# Altium PCB uADC_PCBPcbDoc.PcbDoc (part 1 of 2)
Units mm, origin at the board's own origin, x right, y up, seen from the top; angles counter-clockwise.
Board outline 125 x 63 mm, 4 copper layers (Top Layer, Layer 1, Layer 2, Bottom Layer), stack 2.084 mm thick; 242 components, 92 nets, 541 pads, 139 vias.
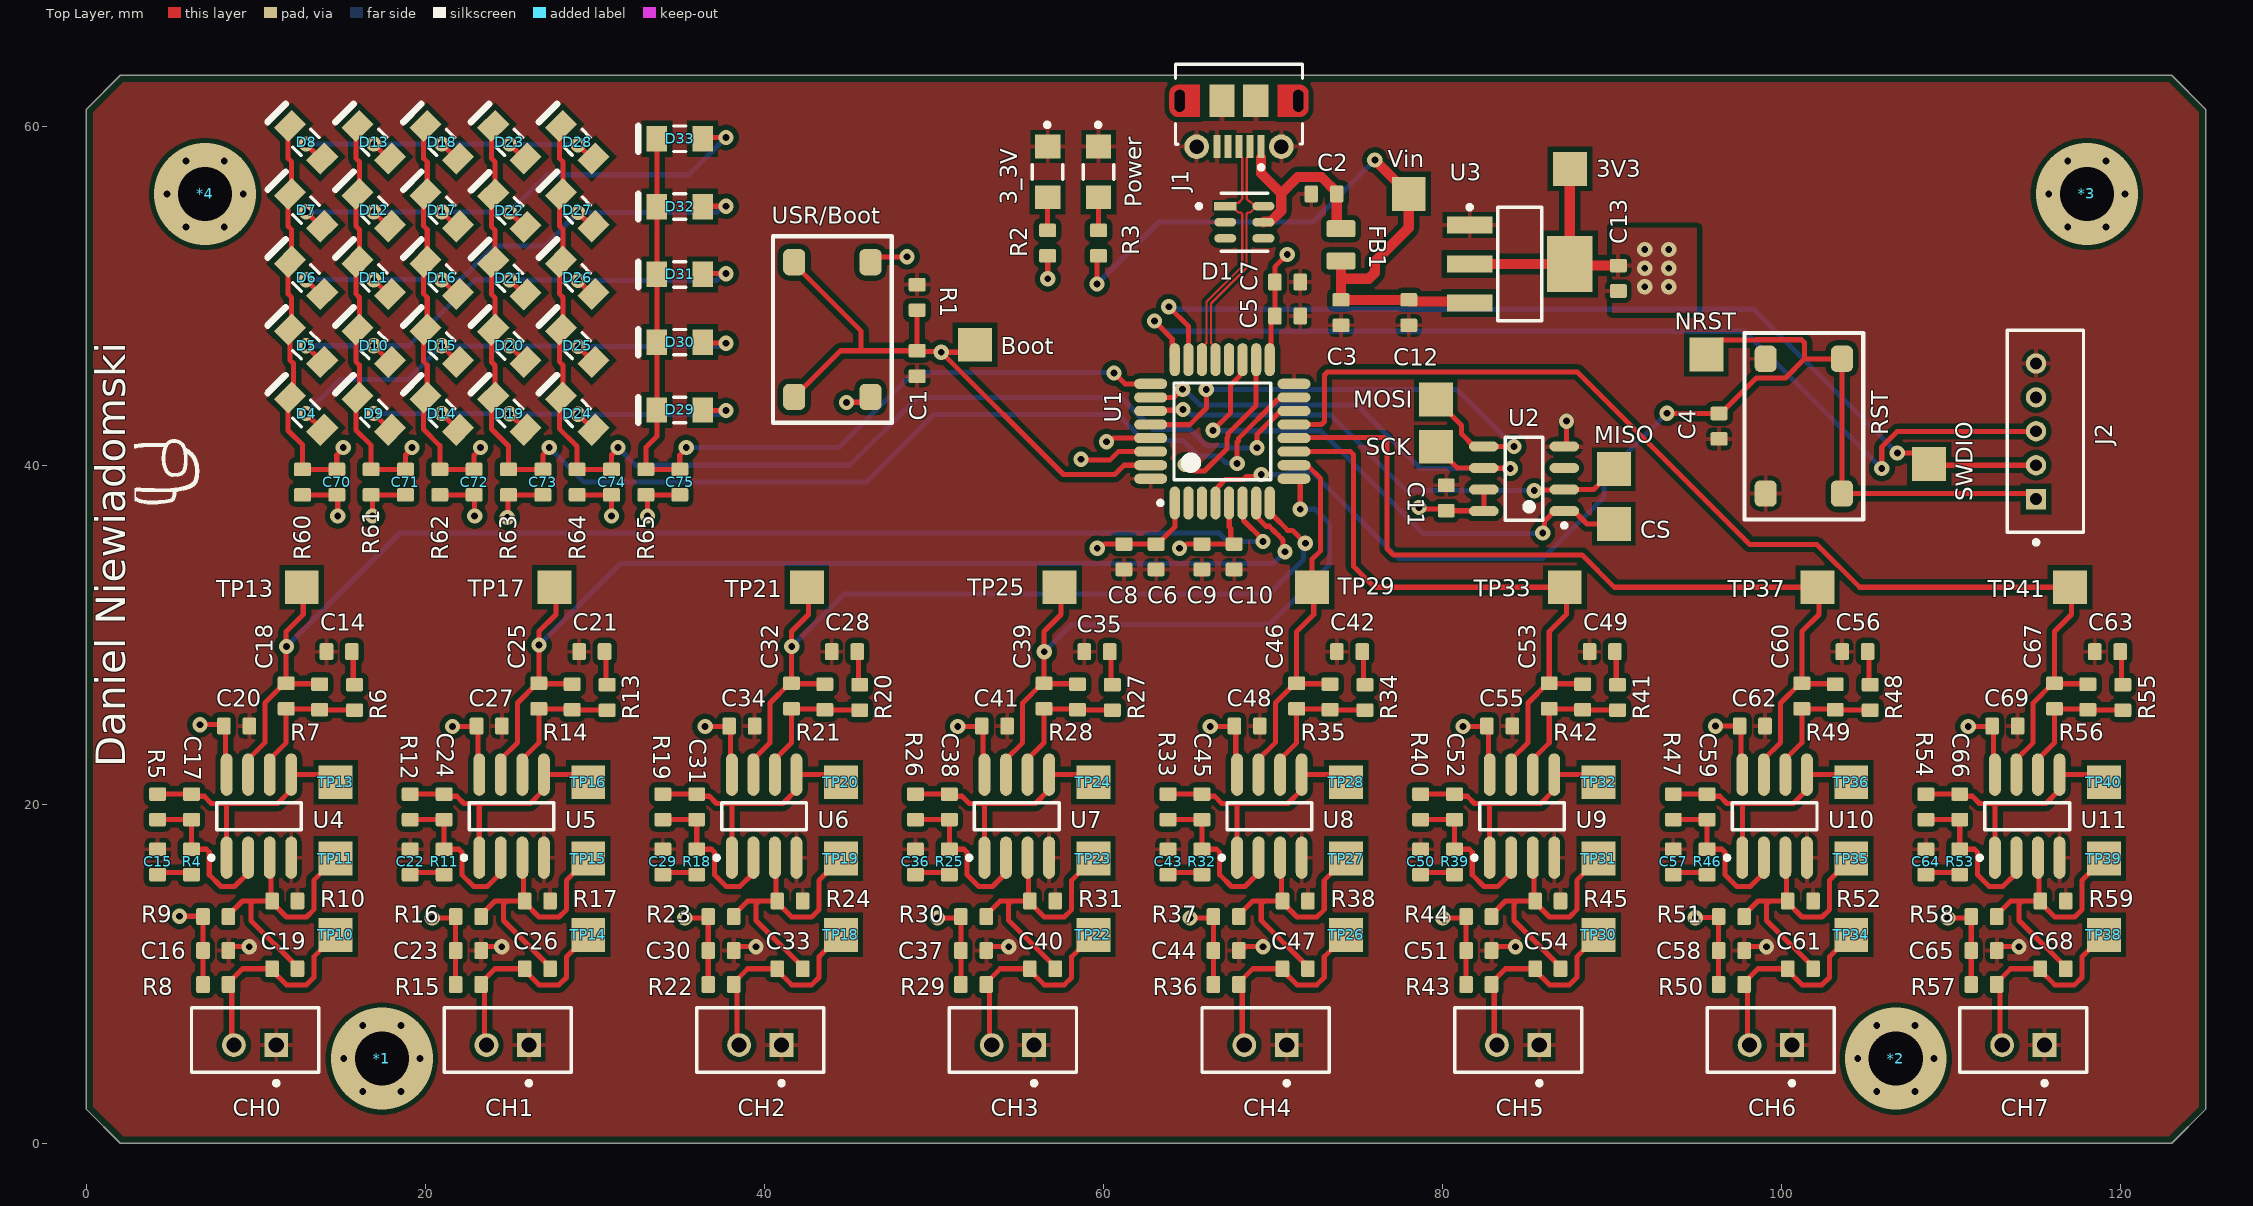
[diagram p0: Top Layer view]
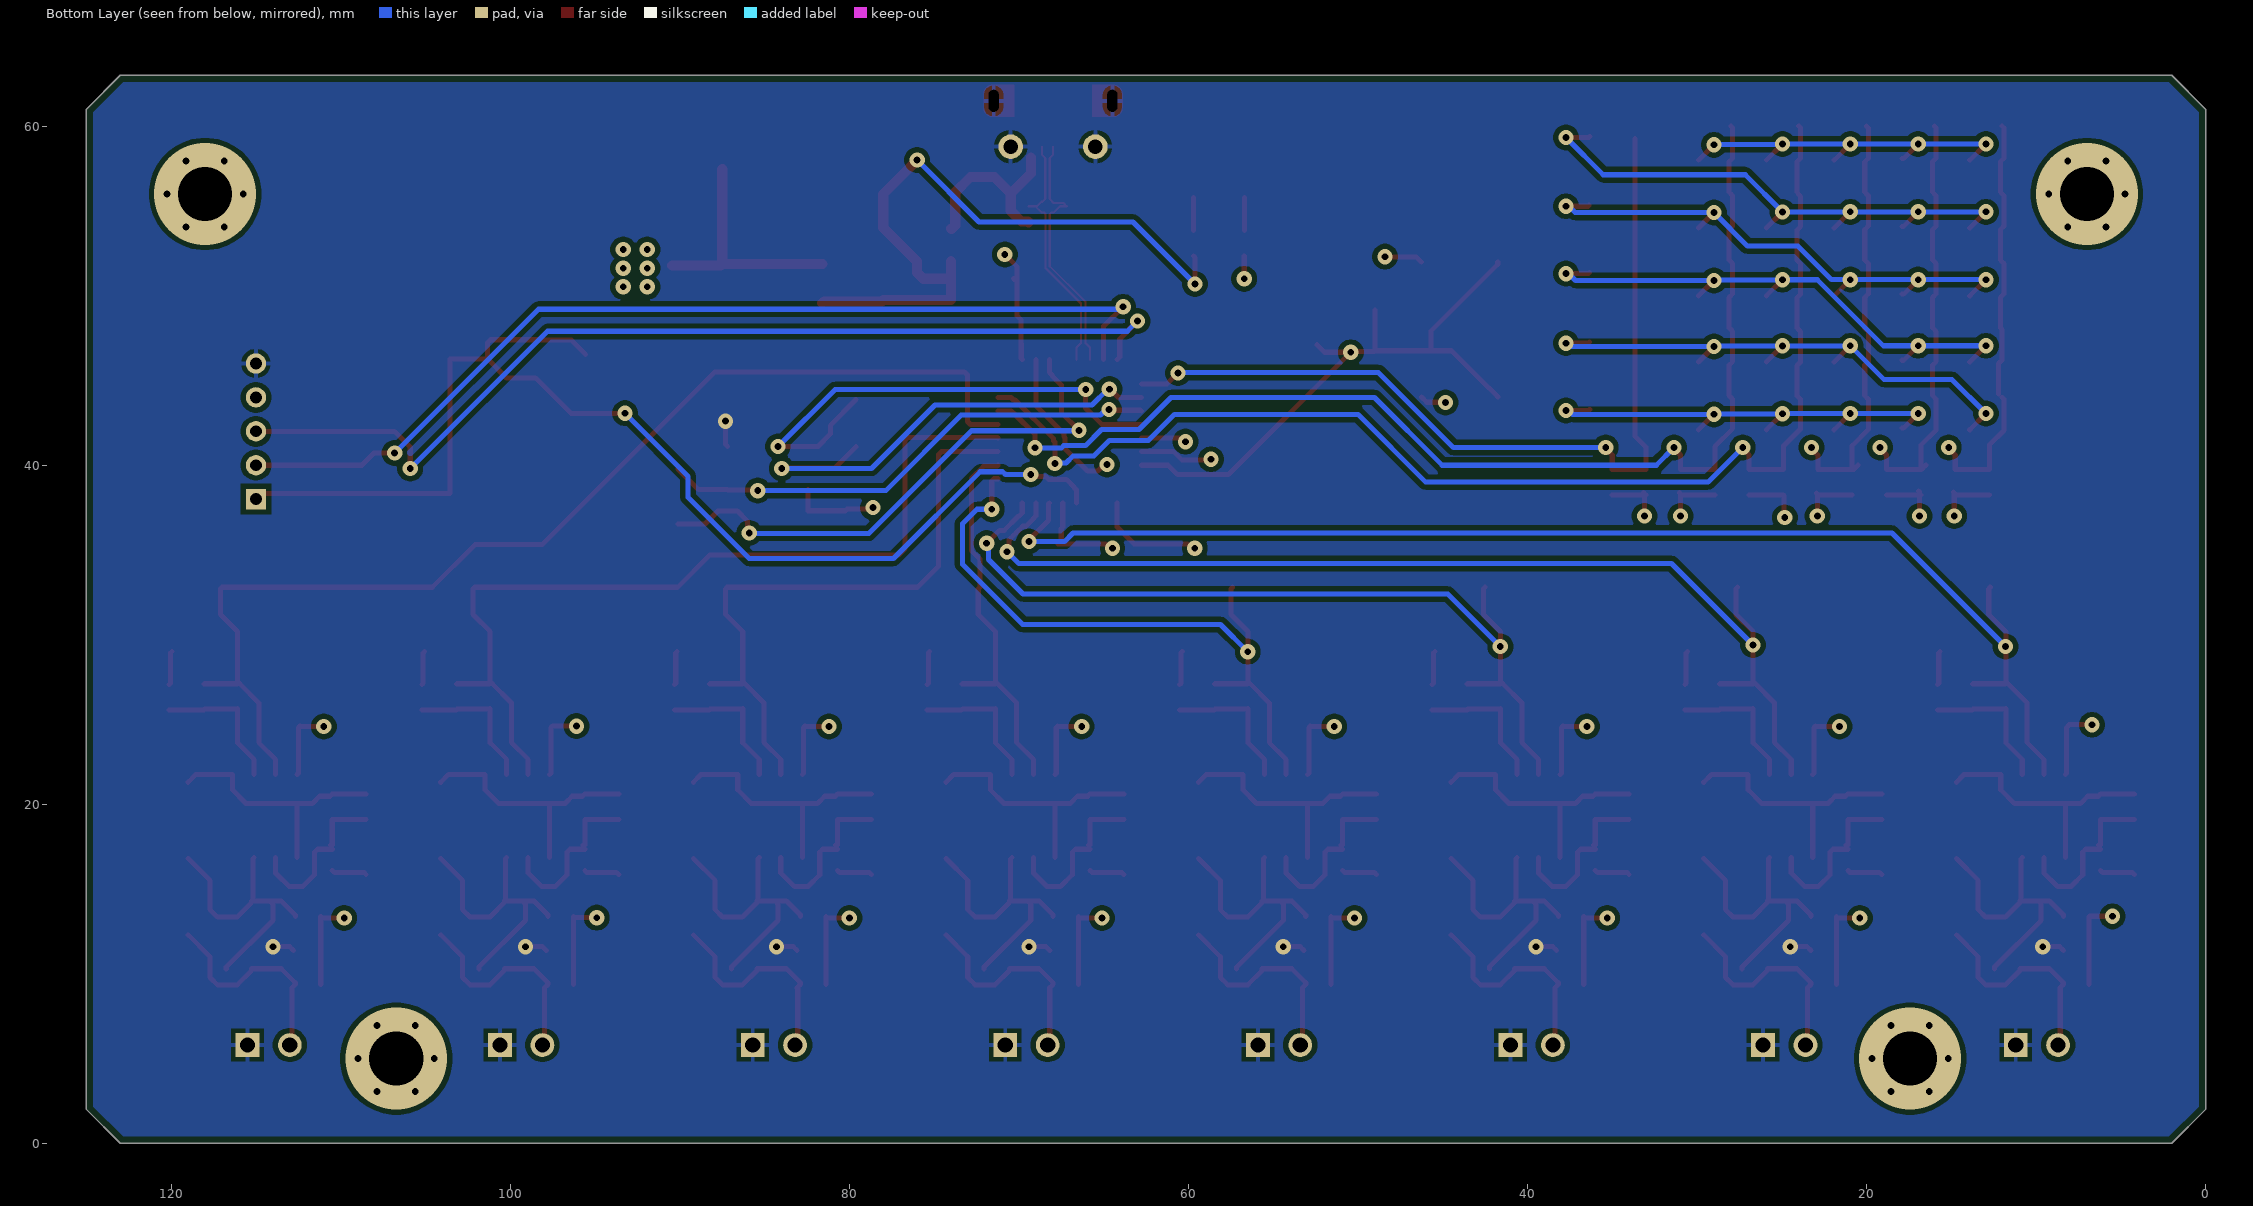
[diagram p1: Bottom Layer view, seen from below]
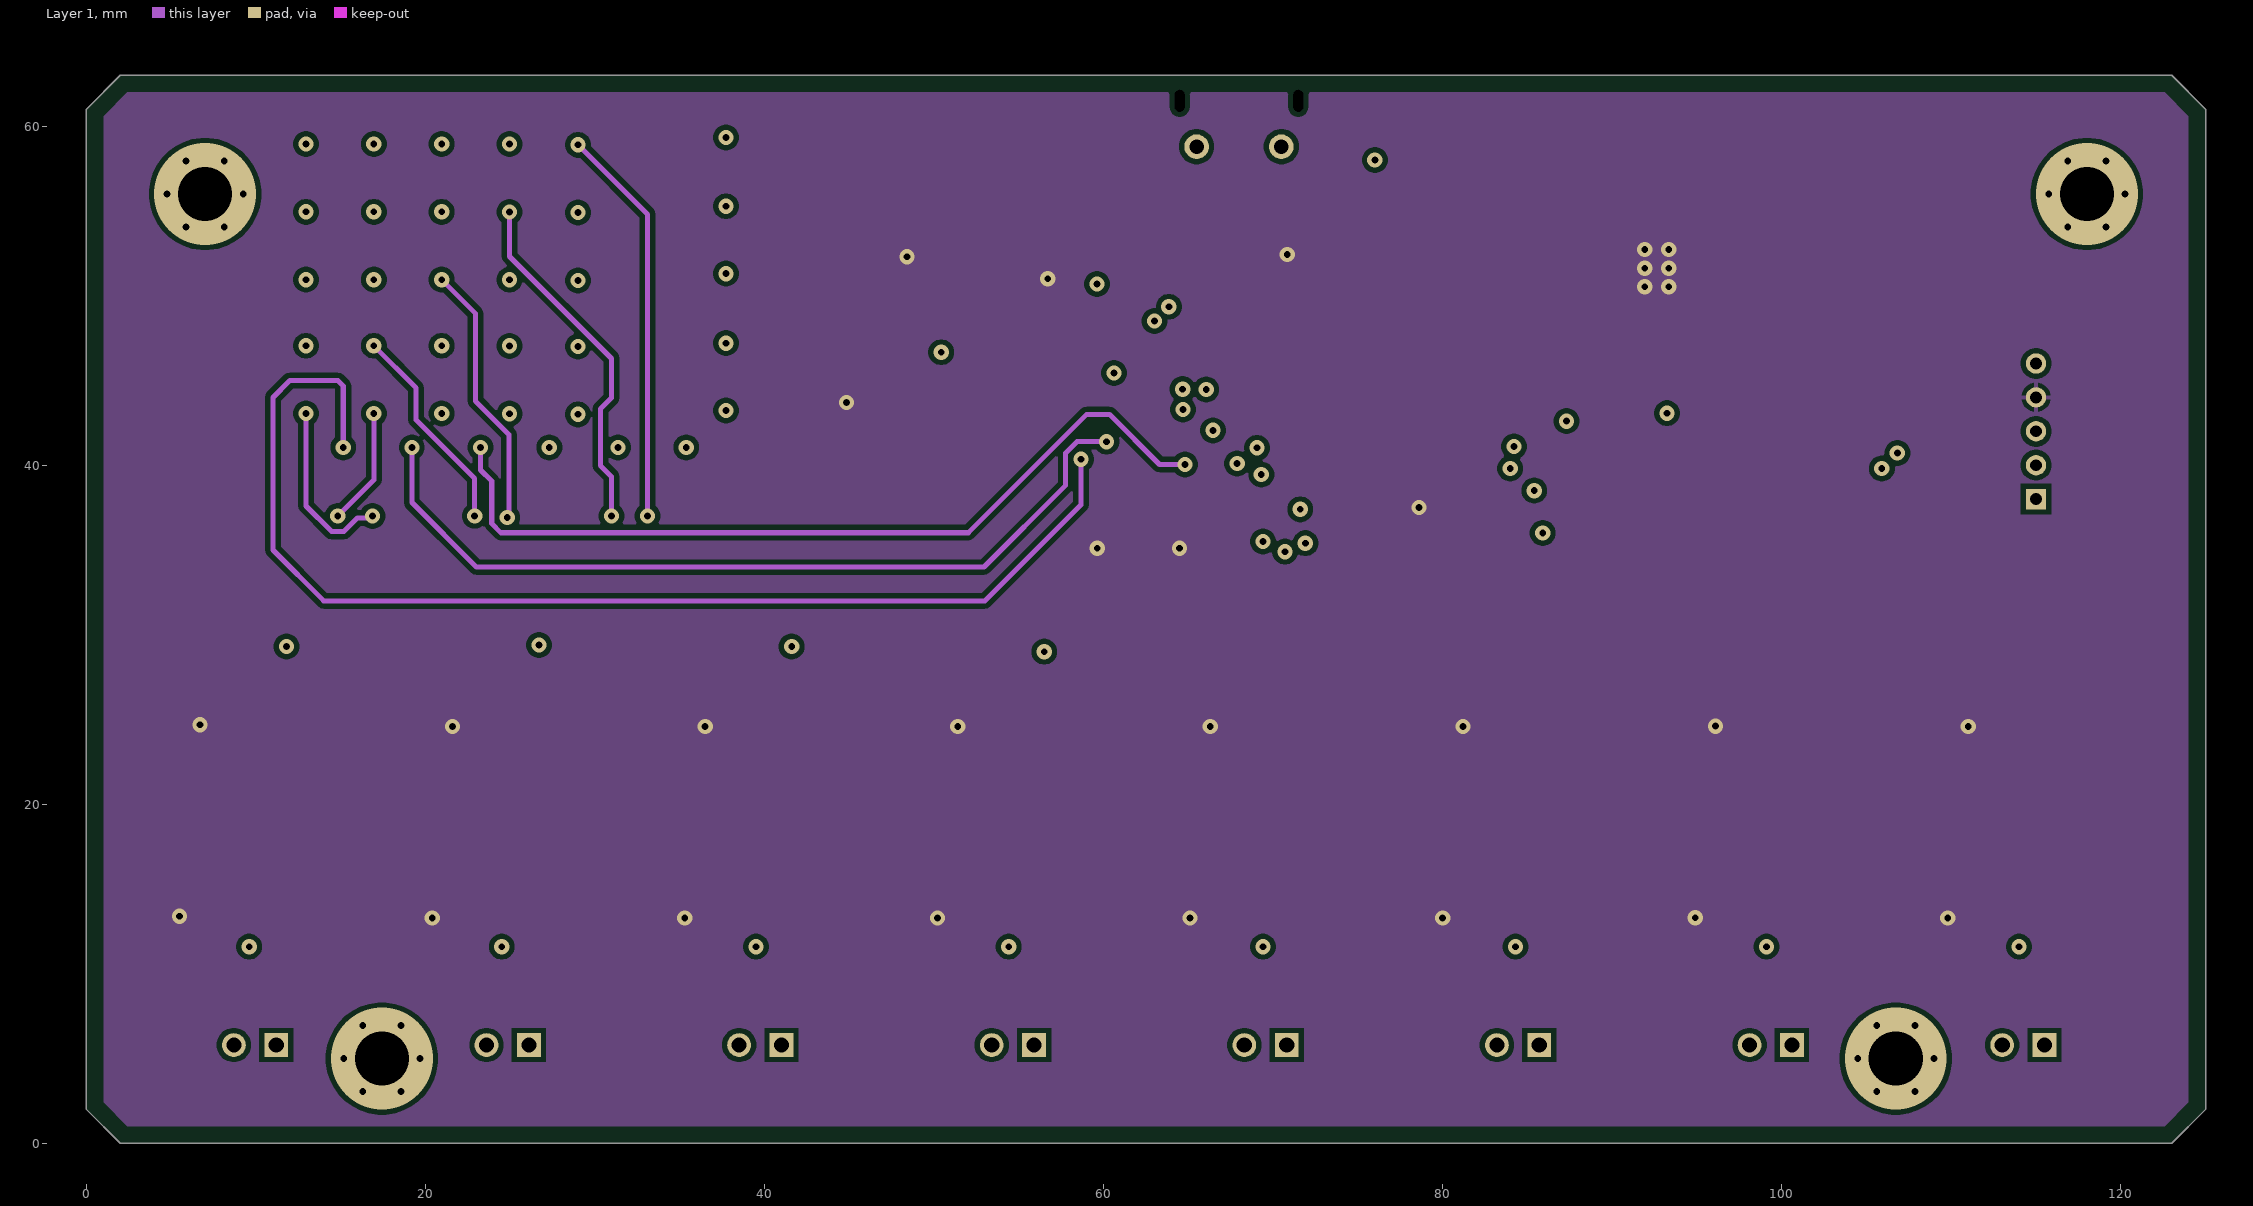
[diagram p2: Layer 1]
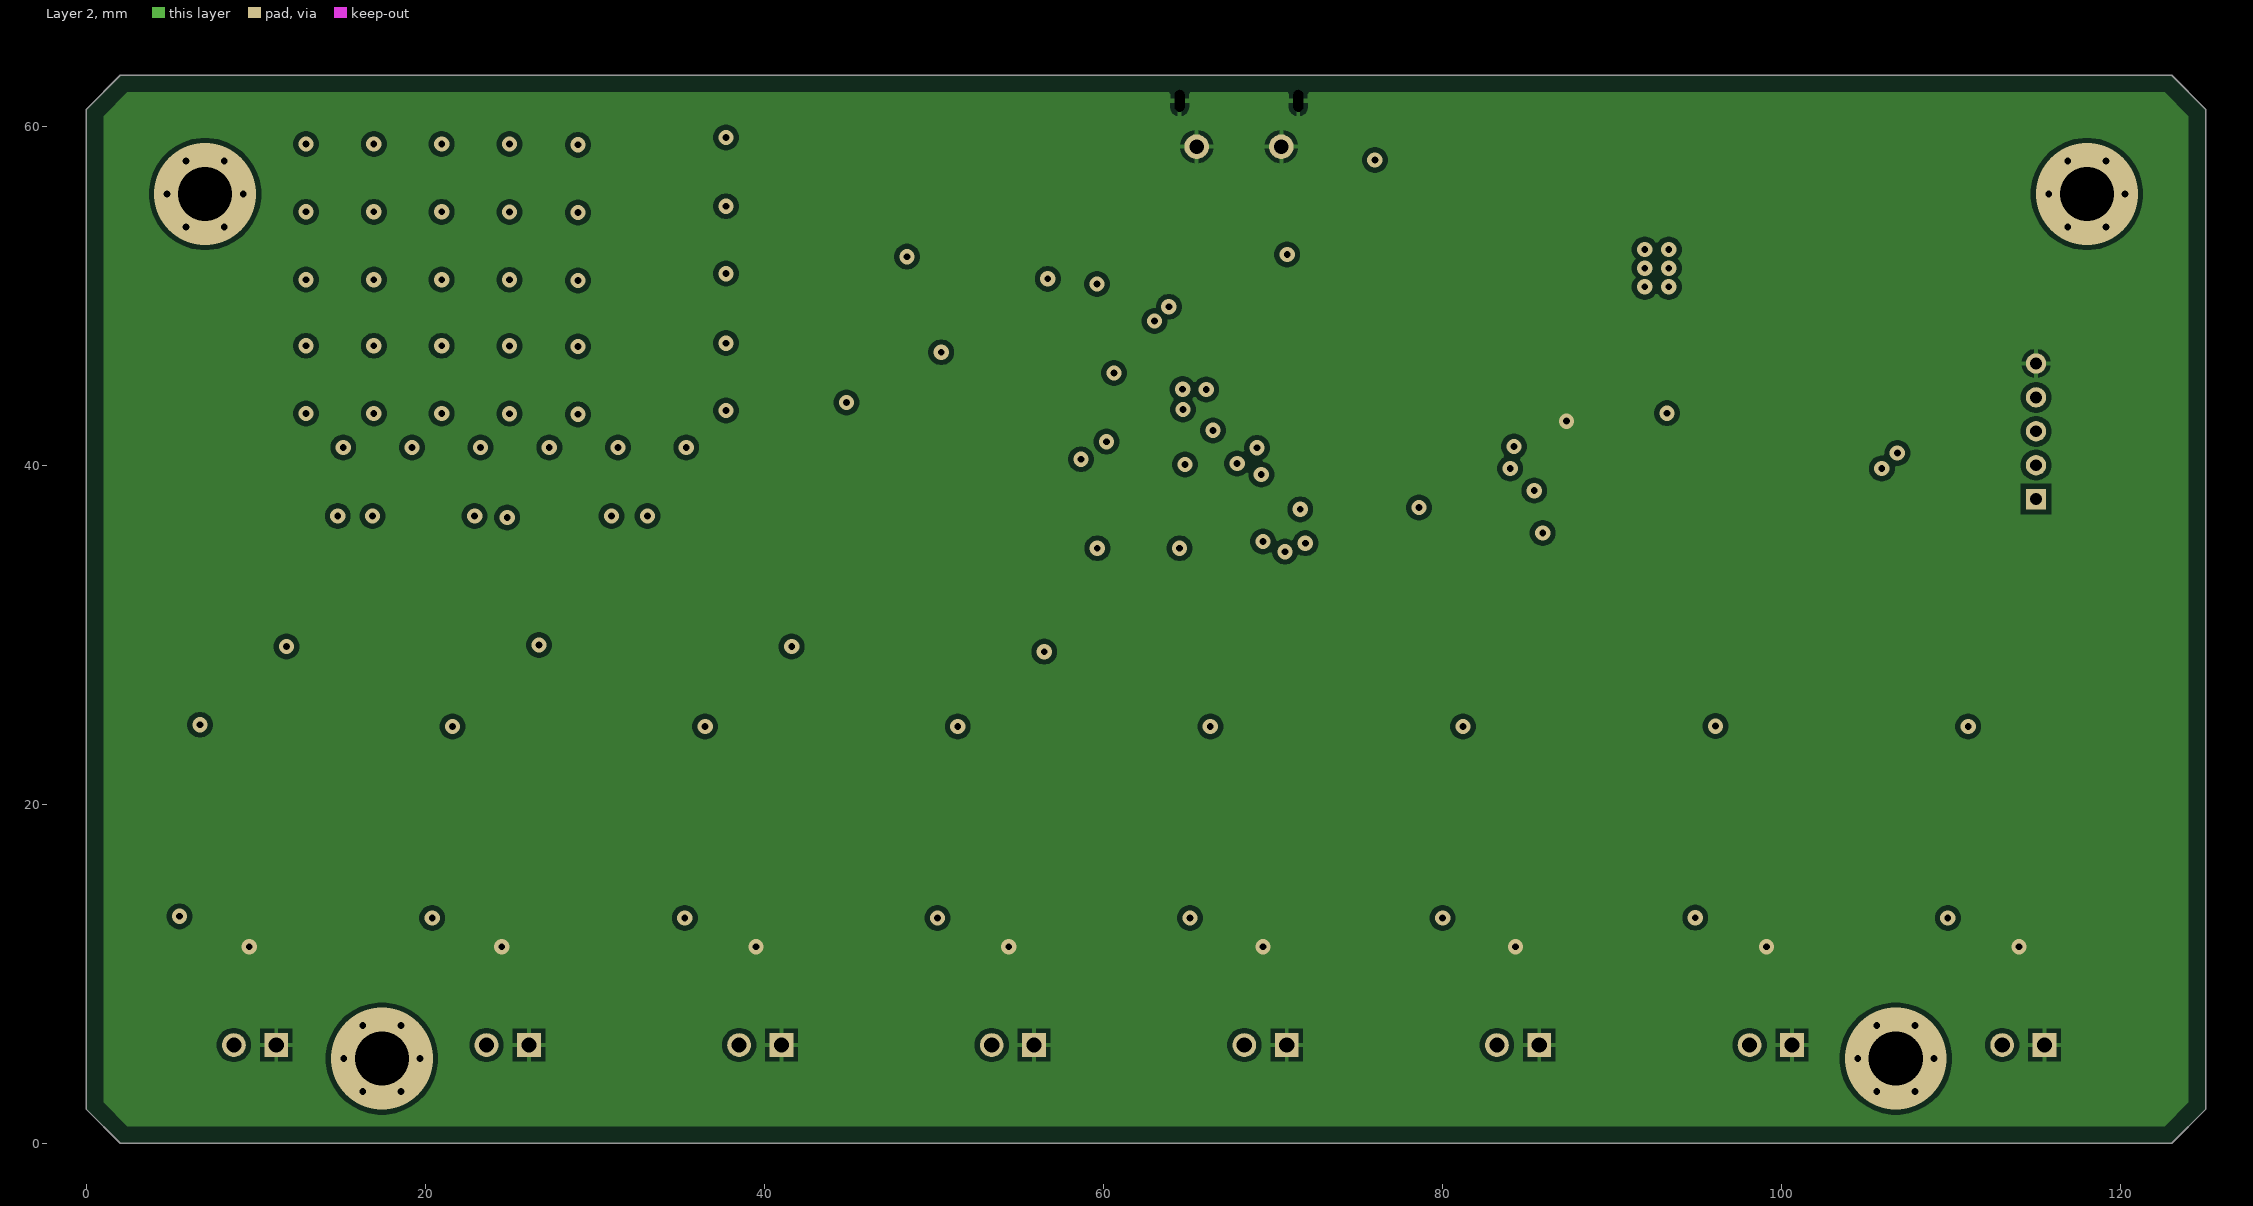
[diagram p3: Layer 2]
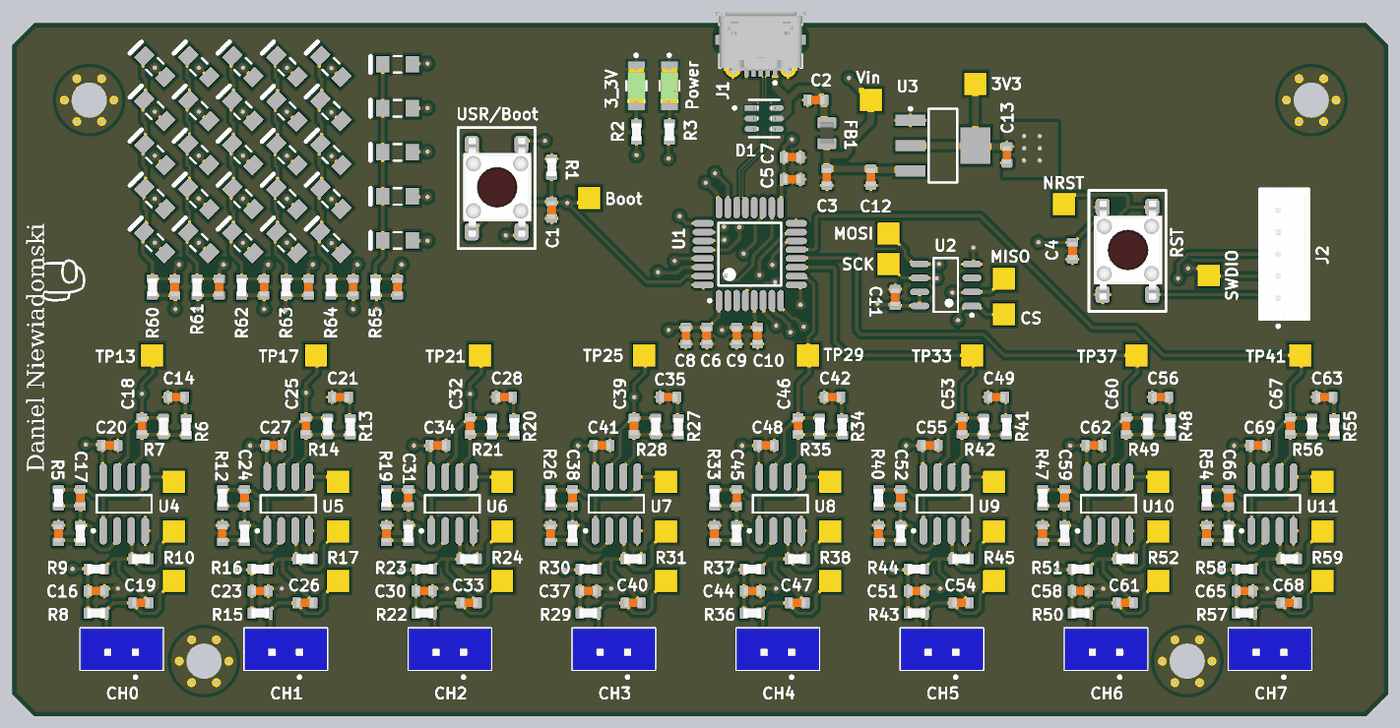
[diagram p5: 3D render of the assembled board from above, using the file's embedded part models]

## Layer stack, top to bottom
Top Solder: solder mask 0.0102, Solder Resist, Dk 3.5
Top Layer: signal copper 0.035
Dielectric 2: prepreg 0.092, PP-006, Dk 4.1
Layer 1: signal copper 0.3
Dielectric 1: dielectric 1.23, FR-4, Dk 4.8
Layer 2: signal copper 0.3
Dielectric 3: prepreg 0.092, PP-006, Dk 4.1
Bottom Layer: signal copper 0.035
Bottom Solder: solder mask 0.0102, Solder Resist, Dk 3.5

## Board outline
0,2 0,61 2,63 123,63 125,61 125,2 123,0 2,0

## Design rules (kind name [scope] priority, off if disabled: settings)
BoardOutlineClearance Inside [OnLayer('Layer 1') OR OnLayer('Layer 2')] p1: gap=1 ignorepadtopadclearanceinfootprint=FALSE
BoardOutlineClearance "Top and Bot" [OnLayer('Top Layer') Or OnLayer('Bottom Layer')] p2: gap=0.4 ignorepadtopadclearanceinfootprint=FALSE
Clearance USB_1 [InNet('D_N') OR InNet('D_P')] p1: gap=0.1 ignorepadtopadclearanceinfootprint=TRUE except(0.2: Arc-Fill Arc-Poly Arc-Region Track-Fill Track-Poly Track-Region)
Clearance [All] p2: gap=0.3 ignorepadtopadclearanceinfootprint=TRUE except(0.2: Arc-SMDPad Track-SMDPad SMDPad-SMDPad)
DiffPairsRouting [All] p1: maxlimit=0.254 minlimit=0.127 mostfreqgap=0.254 toplayer_maxgap=0.127 toplayer_prefgap=0.127 toplayer_minwidth=0.133 toplayer_maxwidth=0.133 toplayer_prefwidth=0.133 midlayer1_mingap=0.254 midlayer1_minwidth=0.381 midlayer1_maxwidth=0.381 midlayer1_prefwidth=0.381 midlayer2_mingap=0.254 midlayer2_minwidth=0.381 midlayer2_maxwidth=0.381 midlayer2_prefwidth=0.381 bottomlayer_maxgap=0.127 bottomlayer_prefgap=0.127 bottomlayer_minwidth=0.133 bottomlayer_maxwidth=0.133 bottomlayer_prefwidth=0.133 impedanceprofiledriven=TRUE impedanceprofileid={852D0771-24A6-4EF3-9EF0-69450BD6242F} impedanceprofilevalue=90.000000 maxuncoupledlength=12.7
HoleSize [All] p1: absolutevalues=TRUE maxlimit=5 minlimit=0.025 maxpercent=80.000 minpercent=20.000
Length "Schematic Length Constraint" [InNet('D_N')] p1: maxlimit=100 minlimit=0
MaxMinImpedance "Schematic Impedance Constraint" [InNet('D_N')] p1: minimum=80.00 maximum=100.0
MinimumSolderMaskSliver USB_2 [HasFootprint('USB-MICRO-B_V')] p1: minsoldermaskwidth=0.01
MinimumSolderMaskSliver [All] p2: minsoldermaskwidth=0.254
PolygonConnect "GND AND 3V3 vias" [IsVia And (InNet('3V3') Or InNet('GND'))] p1: connectstyle=Direct reliefconductorwidth=0.254 reliefentries=4 polygonreliefangle="90 Angle" airgapwidth=0.254
PolygonConnect [All] p2: connectstyle=Relief reliefconductorwidth=0.254 reliefentries=4 polygonreliefangle="90 Angle" airgapwidth=0.254
RoomDefinition CH4 [InComponentClass('CH4')] p1: confinementstyle=ConfineIn formatcopy=TRUE lockcomponents=FALSE outline 62.6,3 77.5,3 77.5,34.2 62.6,34.2
RoomDefinition CH0 [InComponentClass('CH0')] p2: confinementstyle=ConfineIn formatcopy=FALSE lockcomponents=FALSE outline 3,3 17.9,3 17.9,34.2 3,34.2
RoomDefinition CH1 [InComponentClass('CH1')] p3: confinementstyle=ConfineIn formatcopy=TRUE lockcomponents=FALSE outline 17.9,3 32.8,3 32.8,34.2 17.9,34.2
RoomDefinition CH5 [InComponentClass('CH5')] p4: confinementstyle=ConfineIn formatcopy=TRUE lockcomponents=FALSE outline 77.5,3 92.4,3 92.4,34.2 77.5,34.2
RoomDefinition CH2 [InComponentClass('CH2')] p5: confinementstyle=ConfineIn formatcopy=TRUE lockcomponents=FALSE outline 32.8,3 47.7,3 47.7,34.2 32.8,34.2
RoomDefinition CH3 [InComponentClass('CH3')] p6: confinementstyle=ConfineIn formatcopy=TRUE lockcomponents=FALSE outline 47.7,3 62.6,3 62.6,34.2 47.7,34.2
RoomDefinition CH6 [InComponentClass('CH6')] p7: confinementstyle=ConfineIn formatcopy=TRUE lockcomponents=FALSE outline 92.4,3 107.3,3 107.3,34.2 92.4,34.2
RoomDefinition CH7 [InComponentClass('CH7')] p8: confinementstyle=ConfineIn formatcopy=TRUE lockcomponents=FALSE outline 107.3,3 122.2,3 122.2,34.2 107.3,34.2
RoutingVias [All] p1: holewidth=0.4 width=0.9 viastyle="Through Hole" minholewidth=0.4 minwidth=0.4 maxholewidth=6 maxwidth=6.4
SilkToSilkClearance Reg [HasFootprint('SOT-223_M')] p1: silktosilkclearance=0.1
SilkToSilkClearance SilkToSilkClearance_1 [All] p2: silktosilkclearance=0.254
SilkToSolderMaskClearance Rge [HasFootprint('SOT-223_M')] p1: minsilkscreentomaskgap=0.05 clearancetoexposedcopper=TRUE
SilkToSolderMaskClearance [IsPad] p2: minsilkscreentomaskgap=0.254 clearancetoexposedcopper=TRUE
SolderMaskExpansion [All] p1: expansion=0.102 istentingtop=FALSE
Width USB [InNet('D_N') OR InNet('D_P')] p1: maxlimit=1 minlimit=0.1 preferedwidth=0.15
Width Width_1 [All] p2: maxlimit=5 minlimit=0.3 preferedwidth=0.3
25 further rules are at their usual default settings.

## Classes and differential pairs
component class CH0: C14 C15 C16 C17 C18 C19 C20 CH0 CH0.C9 CH0.C10 CH0.C11 CH0.C12 CH0.C13 CH0.C14 CH0.C19 CH0.P2 CH0.R9 CH0.R10 CH0.R11 CH0.R12 CH0.R13 CH0.R14 CH0.R15 CH0.TP11 CH0.TP12 CH0.TP13 CH0.TP14 CH0.U3 R4 R5 R6 R7 R8 R9 R10 TP10 TP11 TP13 U4
component class CH1: C21 C22 C23 C24 C25 C26 C27 CH1 CH1.C9 CH1.C10 CH1.C11 CH1.C12 CH1.C13 CH1.C14 CH1.C19 CH1.P2 CH1.R9 CH1.R10 CH1.R11 CH1.R12 CH1.R13 CH1.R14 CH1.R15 CH1.TP11 CH1.TP12 CH1.TP13 CH1.TP14 CH1.U3 R11 R12 R13 R14 R15 R16 R17 TP14 TP15 TP16 TP17 U5
component class CH7: C63 C64 C65 C66 C67 C68 C69 CH7 CH7.C9 CH7.C10 CH7.C11 CH7.C12 CH7.C13 CH7.C14 CH7.C19 CH7.P2 CH7.R9 CH7.R10 CH7.R11 CH7.R12 CH7.R13 CH7.R14 CH7.R15 CH7.TP11 CH7.TP12 CH7.TP13 CH7.TP14 CH7.U3 M*_CH7 R53 R54 R55 R56 R57 R58 R59 TP38 TP39 TP40 TP41 U11
component class CH6: C56 C57 C58 C59 C60 C61 C62 CH6 CH6.C9 CH6.C10 CH6.C11 CH6.C12 CH6.C13 CH6.C14 CH6.C19 CH6.P2 CH6.R9 CH6.R10 CH6.R11 CH6.R12 CH6.R13 CH6.R14 CH6.R15 CH6.TP11 CH6.TP12 CH6.TP13 CH6.TP14 CH6.U3 M*_CH6 R46 R47 R48 R49 R50 R51 R52 TP34 TP35 TP36 TP37 U10
component class CH5: C49 C50 C51 C52 C53 C54 C55 CH5 CH5.C9 CH5.C10 CH5.C11 CH5.C12 CH5.C13 CH5.C14 CH5.C19 CH5.P2 CH5.R9 CH5.R10 CH5.R11 CH5.R12 CH5.R13 CH5.R14 CH5.R15 CH5.TP11 CH5.TP12 CH5.TP13 CH5.TP14 CH5.U3 M*_CH5 R39 R40 R41 R42 R43 R44 R45 TP30 TP31 TP32 TP33 U9
component class CH4: C42 C43 C44 C45 C46 C47 C48 CH4 CH4.C9 CH4.C10 CH4.C11 CH4.C12 CH4.C13 CH4.C14 CH4.C19 CH4.P2 CH4.R9 CH4.R10 CH4.R11 CH4.R12 CH4.R13 CH4.R14 CH4.R15 CH4.TP11 CH4.TP12 CH4.TP13 CH4.TP14 CH4.U3 M*_CH4 R32 R33 R34 R35 R36 R37 R38 TP26 TP27 TP28 TP29 U8
component class CH3: C35 C36 C37 C38 C39 C40 C41 CH3 CH3.C9 CH3.C10 CH3.C11 CH3.C12 CH3.C13 CH3.C14 CH3.C19 CH3.P2 CH3.R9 CH3.R10 CH3.R11 CH3.R12 CH3.R13 CH3.R14 CH3.R15 CH3.TP11 CH3.TP12 CH3.TP13 CH3.TP14 CH3.U3 M*_CH3 R25 R26 R27 R28 R29 R30 R31 TP22 TP23 TP24 TP25 U7
component class CH2: C28 C29 C30 C31 C32 C33 C34 CH2 CH2.C9 CH2.C10 CH2.C11 CH2.C12 CH2.C13 CH2.C14 CH2.C19 CH2.P2 CH2.R9 CH2.R10 CH2.R11 CH2.R12 CH2.R13 CH2.R14 CH2.R15 CH2.TP11 CH2.TP12 CH2.TP13 CH2.TP14 CH2.U3 M*_CH2 R18 R19 R20 R21 R22 R23 R24 TP18 TP19 TP20 TP21 U6
channel class mic_amp: CH0 CH1 CH2 CH3 CH4 CH5 CH6 CH7
net class MIC[0..7]: MIC0 MIC1 MIC2 MIC3 MIC4 MIC5 MIC6 MIC7
component class U_screen: .D1 .D2 .D3 .D4 .D5 .D6 .D7 .D8 .D9 .D10 .D11 .D12 .D13 .D14 .D15 .D16 .D17 .D18 .D19 .D20 .D21 .D22 .D23 .D24 .D25 .D26 .D27 .D28 .D29 .D30 .R2 .R3 .R4 .R5 .R6 .R7 C70 C71 C72 C73 C74 C75 D4 D5 D6 D7 D8 D9 D10 D11 D12 D13 D14 D15 D16 D17 D18 D19 D20 D21 D22 D23 D24 D25 D26 D27 D28 D29 D30 D31 D32 D33 R60 R61 R62 R63 R64 R65
component class Main: 3_3V 3V3 *1 *2 *3 *4 .* .*1 .*2 .*3 .C1 .C2 .C3 .C4 .C5 .C6 .C7 .C8 .C15 .C16 .C17 .C18 .C60 .D31 .D32 .D33 .FB1 .J1 .J2 .R1 .R8 .R16 .SW1 .SW2 .TP1 .TP2 .TP3 .TP4 .TP5 .TP6 .TP8 .TP9 .TP10 .U1 .U2 .U4 Boot C1 C2 C3 C4 C5 C6 C7 C8 C9 C10 C11 C12 C13 CS D1 FB1 J1 J2 MISO MOSI NRST Power R1 R2 R3 RST SCK SWDIO U1 U2 U3 USR/Boot Vin
differential pair D: +D_P -D_N

## Components (designator, comment, footprint, x,y, rotation, side; value= is the part's Value field where it differs from the comment)
3_3V "598-8270-107F" FP-598-8270-107F-MFG 56.7,57.3 r270 top (schematic designator D32)
3V3 "Pad" PAD_SQ_2MM 87.509,57.481 r0 top (schematic designator TP2)
*1 "M3Hole" M3_Hole 17.43,5 r0 top
*2 "M3Hole" M3_Hole 106.729,5 r0 top
*3 "M3Hole" M3_Hole 118,56 r0 top
*4 "M3Hole" M3_Hole 7,56 r0 top (schematic designator *)
Boot "Pad" PAD_SQ_2MM 52.412,47.105 r0 top (schematic designator TP3)
C1 "100n" CAP_0603 49,46 r90 top (schematic designator C15)
C2 "100n" CAP_0603 73,56 r0 top (schematic designator C4)
C3 "100n" CAP_0603 74,49 r90 top (schematic designator C5)
C4 "100n" CAP_0603 96.3,42.3 r90 top (schematic designator C16)
C5 "4.7u" CAP_0603 70.85,48.8 r180 top (schematic designator C17)
C6 "4.7u" CAP_0603 63.1,34.6 r90 top (schematic designator C8)
C7 "100n" CAP_0603 70.85,50.8 r180 top (schematic designator C1)
C8 "100n" CAP_0603 61.2,34.6 r90 top (schematic designator C60)
C9 "10n" CAP_0603 65.8,34.6 r90 top (schematic designator C2)
C10 "1u" CAP_0603 67.7,34.6 r90 top (schematic designator C3)
C11 "100n" CAP_0603 80.211,38.068 r270 top (schematic designator C18)
C12 "100n" CAP_0603 78,49 r90 top (schematic designator C6)
C13 "22u" CAP_0603 90.358,51.025 r90 top (schematic designator C7)
C14 "22u" CAP_0603 14.912,29 r180 top (schematic designator C9)
C15 "22u" CAP_0603 4.2,16.6 r90 top (schematic designator C10)
C16 "100n" CAP_0603 7.628,11.375 r180 top (schematic designator C11)
C17 "33p" CAP_0603 6.2,19.85 r270 top (schematic designator C13)
C18 "33p" CAP_0603 11.785,26.387 r270 top (schematic designator C19)
C19 "1u" CAP_0603 11.7,10.3 r180 top (schematic designator C12)
C20 "100n" CAP_0603 8.862,24.617 r180 top (schematic designator C14)
C21 "22u" CAP_0603 29.812,29 r180 top (schematic designator C9)
C22 "22u" CAP_0603 19.1,16.6 r90 top (schematic designator C10)
C23 "100n" CAP_0603 22.528,11.375 r180 top (schematic designator C11)
C24 "33p" CAP_0603 21.1,19.85 r270 top (schematic designator C13)
C25 "33p" CAP_0603 26.685,26.387 r270 top (schematic designator C19)
C26 "1u" CAP_0603 26.6,10.3 r180 top (schematic designator C12)
C27 "100n" CAP_0603 23.762,24.617 r180 top (schematic designator C14)
C28 "22u" CAP_0603 44.712,29 r180 top (schematic designator C9)
C29 "22u" CAP_0603 34,16.6 r90 top (schematic designator C10)
C30 "100n" CAP_0603 37.428,11.375 r180 top (schematic designator C11)
C31 "33p" CAP_0603 36,19.85 r270 top (schematic designator C13)
C32 "33p" CAP_0603 41.585,26.387 r270 top (schematic designator C19)
C33 "1u" CAP_0603 41.5,10.3 r180 top (schematic designator C12)
C34 "100n" CAP_0603 38.662,24.617 r180 top (schematic designator C14)
C35 "22u" CAP_0603 59.612,29 r180 top (schematic designator C9)
C36 "22u" CAP_0603 48.9,16.6 r90 top (schematic designator C10)
C37 "100n" CAP_0603 52.328,11.375 r180 top (schematic designator C11)
C38 "33p" CAP_0603 50.9,19.85 r270 top (schematic designator C13)
C39 "33p" CAP_0603 56.485,26.387 r270 top (schematic designator C19)
C40 "1u" CAP_0603 56.4,10.3 r180 top (schematic designator C12)
C41 "100n" CAP_0603 53.562,24.617 r180 top (schematic designator C14)
C42 "22u" CAP_0603 74.512,29 r180 top (schematic designator C9)
C43 "22u" CAP_0603 63.8,16.6 r90 top (schematic designator C10)
C44 "100n" CAP_0603 67.228,11.375 r180 top (schematic designator C11)
C45 "33p" CAP_0603 65.8,19.85 r270 top (schematic designator C13)
C46 "33p" CAP_0603 71.385,26.387 r270 top (schematic designator C19)
C47 "1u" CAP_0603 71.3,10.3 r180 top (schematic designator C12)
C48 "100n" CAP_0603 68.462,24.617 r180 top (schematic designator C14)
C49 "22u" CAP_0603 89.412,29 r180 top (schematic designator C9)
C50 "22u" CAP_0603 78.7,16.6 r90 top (schematic designator C10)
C51 "100n" CAP_0603 82.128,11.375 r180 top (schematic designator C11)
C52 "33p" CAP_0603 80.7,19.85 r270 top (schematic designator C13)
C53 "33p" CAP_0603 86.285,26.387 r270 top (schematic designator C19)
C54 "1u" CAP_0603 86.2,10.3 r180 top (schematic designator C12)
C55 "100n" CAP_0603 83.362,24.617 r180 top (schematic designator C14)
C56 "22u" CAP_0603 104.312,29 r180 top (schematic designator C9)
C57 "22u" CAP_0603 93.6,16.6 r90 top (schematic designator C10)
C58 "100n" CAP_0603 97.028,11.375 r180 top (schematic designator C11)
C59 "33p" CAP_0603 95.6,19.85 r270 top (schematic designator C13)
C60 "33p" CAP_0603 101.185,26.387 r270 top (schematic designator C19)
C61 "1u" CAP_0603 101.1,10.3 r180 top (schematic designator C12)
C62 "100n" CAP_0603 98.262,24.617 r180 top (schematic designator C14)
C63 "22u" CAP_0603 119.212,29 r180 top (schematic designator C9)
C64 "22u" CAP_0603 108.5,16.6 r90 top (schematic designator C10)
C65 "100n" CAP_0603 111.928,11.375 r180 top (schematic designator C11)
C66 "33p" CAP_0603 110.5,19.85 r270 top (schematic designator C13)
C67 "33p" CAP_0603 116.085,26.387 r270 top (schematic designator C19)
C68 "1u" CAP_0603 116,10.3 r180 top (schematic designator C12)
C69 "100n" CAP_0603 113.162,24.617 r180 top (schematic designator C14)
C70 "100n" CAP_0603 14.769,39 r90 top (schematic designator C20)
C71 "100n" CAP_0603 18.82,39 r90 top (schematic designator C21)
C72 "100n" CAP_0603 22.872,39 r90 top (schematic designator C22)
C73 "100n" CAP_0603 26.923,39 r90 top (schematic designator C23)
C74 "100n" CAP_0603 30.974,39 r90 top (schematic designator C24)
C75 "100n" CAP_0603 35,39 r90 top (schematic designator C25)
CH0 "B2B-EH-A" JST-B2B-EH-A_V 9.95,6.1 r180 top (schematic designator P2)
CH1 "B2B-EH-A" JST-B2B-EH-A_V 24.85,6.1 r180 top (schematic designator P2)
CH2 "B2B-EH-A" JST-B2B-EH-A_V 39.75,6.1 r180 top (schematic designator P2)
CH3 "B2B-EH-A" JST-B2B-EH-A_V 54.65,6.1 r180 top (schematic designator P2)
CH4 "B2B-EH-A" JST-B2B-EH-A_V 69.55,6.1 r180 top (schematic designator P2)
CH5 "B2B-EH-A" JST-B2B-EH-A_V 84.45,6.1 r180 top (schematic designator P2)
CH6 "B2B-EH-A" JST-B2B-EH-A_V 99.35,6.1 r180 top (schematic designator P2)
CH7 "B2B-EH-A" JST-B2B-EH-A_V 114.25,6.1 r180 top (schematic designator P2)
CS "Pad" PAD_SQ_2MM 90.1,36.535 r180 top (schematic designator TP9)
D1 "IP4220CZ6F" FP-SOT457-IPC_A 68.3,54.33 r0 top (schematic designator D31)
D4 "SML-LX1206IC-TR" LUMX-SML-LX1206IC_V 12.955,43.045 r135 top (schematic designator D10)
D5 "SML-LX1206IC-TR" LUMX-SML-LX1206IC_V 12.955,47.045 r135 top (schematic designator D15)
D6 "SML-LX1206IC-TR" LUMX-SML-LX1206IC_V 12.955,51.045 r135 top (schematic designator D20)
D7 "SML-LX1206IC-TR" LUMX-SML-LX1206IC_V 12.955,55.045 r135 top (schematic designator D25)
D8 "SML-LX1206IC-TR" LUMX-SML-LX1206IC_V 12.955,59.045 r135 top (schematic designator D30)
D9 "SML-LX1206IC-TR" LUMX-SML-LX1206IC_V 16.955,43.045 r135 top (schematic designator D5)
D10 "SML-LX1206IC-TR" LUMX-SML-LX1206IC_V 16.955,47.045 r135 top (schematic designator D14)
D11 "SML-LX1206IC-TR" LUMX-SML-LX1206IC_V 16.955,51.045 r135 top (schematic designator D19)
D12 "SML-LX1206IC-TR" LUMX-SML-LX1206IC_V 16.955,55.045 r135 top (schematic designator D24)
D13 "SML-LX1206IC-TR" LUMX-SML-LX1206IC_V 16.955,59.045 r135 top (schematic designator D29)
D14 "SML-LX1206IC-TR" LUMX-SML-LX1206IC_V 20.955,43.045 r135 top (schematic designator D4)
D15 "SML-LX1206IC-TR" LUMX-SML-LX1206IC_V 20.955,47.045 r135 top (schematic designator D9)
D16 "SML-LX1206IC-TR" LUMX-SML-LX1206IC_V 20.955,51.045 r135 top (schematic designator D18)
D17 "SML-LX1206IC-TR" LUMX-SML-LX1206IC_V 20.955,55.045 r135 top (schematic designator D23)
D18 "SML-LX1206IC-TR" LUMX-SML-LX1206IC_V 20.955,59.045 r135 top (schematic designator D28)
D19 "SML-LX1206IC-TR" LUMX-SML-LX1206IC_V 24.955,43.045 r135 top (schematic designator D3)
D20 "SML-LX1206IC-TR" LUMX-SML-LX1206IC_V 24.955,47.034 r135 top (schematic designator D8)
D21 "SML-LX1206IC-TR" LUMX-SML-LX1206IC_V 24.955,51.023 r135 top (schematic designator D13)
D22 "SML-LX1206IC-TR" LUMX-SML-LX1206IC_V 24.955,55.011 r135 top
D23 "SML-LX1206IC-TR" LUMX-SML-LX1206IC_V 24.955,59.045 r135 top (schematic designator D27)
D24 "SML-LX1206IC-TR" LUMX-SML-LX1206IC_V 28.955,43.045 r135 top (schematic designator D2)
D25 "SML-LX1206IC-TR" LUMX-SML-LX1206IC_V 28.955,47.045 r135 top (schematic designator D7)
D26 "SML-LX1206IC-TR" LUMX-SML-LX1206IC_V 28.955,51.045 r135 top (schematic designator D12)
D27 "SML-LX1206IC-TR" LUMX-SML-LX1206IC_V 28.955,55.045 r135 top (schematic designator D17)
D28 "SML-LX1206IC-TR" LUMX-SML-LX1206IC_V 28.955,59.045 r135 top (schematic designator D26)
D29 "SML-LX1206IC-TR" LUMX-SML-LX1206IC_V 35,43.257 r180 top (schematic designator D1)
D30 "SML-LX1206IC-TR" LUMX-SML-LX1206IC_V 35,47.257 r180 top (schematic designator D6)
D31 "SML-LX1206IC-TR" LUMX-SML-LX1206IC_V 35,51.257 r180 top (schematic designator D11)
D32 "SML-LX1206IC-TR" LUMX-SML-LX1206IC_V 35,55.257 r180 top (schematic designator D16)
D33 "SML-LX1206IC-TR" LUMX-SML-LX1206IC_V 35,59.257 r180 top (schematic designator D21)
FB1 "FB0805" FB_0805 74,53 r270 top
J1 "105017-0001" USB-MICRO-B_V 67.985,60.141 r180 top
J2 "B5B-PH-K-S(LF)(SN)" FP-B5B-PH-K-S_LF_SN-MFG 115.55,42 r90 top
MISO "Pad" PAD_SQ_2MM 90.1,39.768 r180 top (schematic designator TP5)
MOSI "Pad" PAD_SQ_2MM 79.6,43.87 r270 top (schematic designator TP10)
NRST "Pad" PAD_SQ_2MM 95.549,46.536 r0 top (schematic designator TP4)
Power "598-8270-107F" FP-598-8270-107F-MFG 59.7,57.3 r270 top (schematic designator D33)
R1 "10k" RES_0603 49,49.9 r270 top
R2 "150" RES_0603 56.7,53.1 r270 top (schematic designator R8)
R3 "330" RES_0603 59.7,53.1 r270 top (schematic designator R16)
R4 "1k" RES_0603 6.2,16.6 r270 top (schematic designator R9)
R5 "100k" RES_0603 4.2,19.85 r270 top (schematic designator R10)
R6 "1k" RES_0603 15.816,26.303 r90 top (schematic designator R11)
R7 "22k" RES_0603 13.756,26.333 r270 top (schematic designator R12)
R8 "2.2k" RES_0603 7.628,9.375 r180 top (schematic designator R13)
R9 "100k" RES_0603 7.628,13.375 r180 top (schematic designator R14)
R10 "100k" RES_0603 11.7,14.3 r180 top (schematic designator R15)
R11 "1k" RES_0603 21.1,16.6 r270 top (schematic designator R9)
R12 "100k" RES_0603 19.1,19.85 r270 top (schematic designator R10)
R13 "1k" RES_0603 30.716,26.303 r90 top (schematic designator R11)
R14 "22k" RES_0603 28.656,26.333 r270 top (schematic designator R12)
R15 "2.2k" RES_0603 22.528,9.375 r180 top (schematic designator R13)
R16 "100k" RES_0603 22.528,13.375 r180 top (schematic designator R14)
R17 "100k" RES_0603 26.6,14.3 r180 top (schematic designator R15)
R18 "1k" RES_0603 36,16.6 r270 top (schematic designator R9)
R19 "100k" RES_0603 34,19.85 r270 top (schematic designator R10)
R20 "1k" RES_0603 45.616,26.303 r90 top (schematic designator R11)
R21 "22k" RES_0603 43.556,26.333 r270 top (schematic designator R12)
R22 "2.2k" RES_0603 37.428,9.375 r180 top (schematic designator R13)
R23 "100k" RES_0603 37.428,13.375 r180 top (schematic designator R14)
R24 "100k" RES_0603 41.5,14.3 r180 top (schematic designator R15)
R25 "1k" RES_0603 50.9,16.6 r270 top (schematic designator R9)
R26 "100k" RES_0603 48.9,19.85 r270 top (schematic designator R10)
R27 "1k" RES_0603 60.516,26.303 r90 top (schematic designator R11)
R28 "22k" RES_0603 58.456,26.333 r270 top (schematic designator R12)
R29 "2.2k" RES_0603 52.328,9.375 r180 top (schematic designator R13)
R30 "100k" RES_0603 52.328,13.375 r180 top (schematic designator R14)
R31 "100k" RES_0603 56.4,14.3 r180 top (schematic designator R15)
R32 "1k" RES_0603 65.8,16.6 r270 top (schematic designator R9)
R33 "100k" RES_0603 63.8,19.85 r270 top (schematic designator R10)
R34 "1k" RES_0603 75.416,26.303 r90 top (schematic designator R11)
R35 "22k" RES_0603 73.356,26.333 r270 top (schematic designator R12)
R36 "2.2k" RES_0603 67.228,9.375 r180 top (schematic designator R13)
R37 "100k" RES_0603 67.228,13.375 r180 top (schematic designator R14)
R38 "100k" RES_0603 71.3,14.3 r180 top (schematic designator R15)
R39 "1k" RES_0603 80.7,16.6 r270 top (schematic designator R9)
R40 "100k" RES_0603 78.7,19.85 r270 top (schematic designator R10)
R41 "1k" RES_0603 90.316,26.303 r90 top (schematic designator R11)
R42 "22k" RES_0603 88.256,26.333 r270 top (schematic designator R12)
R43 "2.2k" RES_0603 82.128,9.375 r180 top (schematic designator R13)
R44 "100k" RES_0603 82.128,13.375 r180 top (schematic designator R14)
R45 "100k" RES_0603 86.2,14.3 r180 top (schematic designator R15)
R46 "1k" RES_0603 95.6,16.6 r270 top (schematic designator R9)
R47 "100k" RES_0603 93.6,19.85 r270 top (schematic designator R10)
R48 "1k" RES_0603 105.216,26.303 r90 top (schematic designator R11)
R49 "22k" RES_0603 103.156,26.333 r270 top (schematic designator R12)
R50 "2.2k" RES_0603 97.028,9.375 r180 top (schematic designator R13)
R51 "100k" RES_0603 97.028,13.375 r180 top (schematic designator R14)
R52 "100k" RES_0603 101.1,14.3 r180 top (schematic designator R15)
R53 "1k" RES_0603 110.5,16.6 r270 top (schematic designator R9)
R54 "100k" RES_0603 108.5,19.85 r270 top (schematic designator R10)
R55 "1k" RES_0603 120.116,26.303 r90 top (schematic designator R11)
R56 "22k" RES_0603 118.056,26.333 r270 top (schematic designator R12)
R57 "2.2k" RES_0603 111.928,9.375 r180 top (schematic designator R13)
R58 "100k" RES_0603 111.928,13.375 r180 top (schematic designator R14)
R59 "100k" RES_0603 116,14.3 r180 top (schematic designator R15)
R60 "150" RES_0603 12.743,39 r270 top (schematic designator R2)
R61 "150" RES_0603 16.794,39 r270 top (schematic designator R3)
R62 "150" RES_0603 20.846,39 r270 top (schematic designator R4)
R63 "150" RES_0603 24.897,39 r270 top (schematic designator R5)
R64 "150" RES_0603 28.949,39 r270 top (schematic designator R6)
R65 "150" RES_0603 33,39 r270 top (schematic designator R7)
RST "TSS 61 K" "Generic SMD Tactile switch" 101.3,42.3 r90 top (schematic designator SW1)
SCK "Pad" PAD_SQ_2MM 79.6,41.087 r180 top (schematic designator TP6)
SWDIO "Pad" PAD_SQ_2MM 108.689,40.065 r0 top (schematic designator TP8)
TP10 "Pad" PAD_SQ_2MM 14.7,12.3 r90 top (schematic designator TP11)
TP11 "Pad" PAD_SQ_2MM 14.7,16.8 r90 top (schematic designator TP12)
TP13 "Pad" PAD_SQ_2MM 12.7,32.8 r90 top (schematic designator TP14)
TP13 "Pad" PAD_SQ_2MM 14.7,21.3 r90 top
TP14 "Pad" PAD_SQ_2MM 29.6,12.3 r90 top (schematic designator TP11)
TP15 "Pad" PAD_SQ_2MM 29.6,16.8 r90 top (schematic designator TP12)
TP16 "Pad" PAD_SQ_2MM 29.6,21.3 r90 top (schematic designator TP13)
TP17 "Pad" PAD_SQ_2MM 27.6,32.8 r90 top (schematic designator TP14)
TP18 "Pad" PAD_SQ_2MM 44.5,12.3 r90 top (schematic designator TP11)
TP19 "Pad" PAD_SQ_2MM 44.5,16.8 r90 top (schematic designator TP12)
TP20 "Pad" PAD_SQ_2MM 44.5,21.3 r90 top (schematic designator TP13)
TP21 "Pad" PAD_SQ_2MM 42.5,32.8 r90 top (schematic designator TP14)
TP22 "Pad" PAD_SQ_2MM 59.4,12.3 r90 top (schematic designator TP11)
TP23 "Pad" PAD_SQ_2MM 59.4,16.8 r90 top (schematic designator TP12)
TP24 "Pad" PAD_SQ_2MM 59.4,21.3 r90 top (schematic designator TP13)
TP25 "Pad" PAD_SQ_2MM 57.4,32.8 r90 top (schematic designator TP14)
TP26 "Pad" PAD_SQ_2MM 74.3,12.3 r90 top (schematic designator TP11)
TP27 "Pad" PAD_SQ_2MM 74.3,16.8 r90 top (schematic designator TP12)
TP28 "Pad" PAD_SQ_2MM 74.3,21.3 r90 top (schematic designator TP13)
TP29 "Pad" PAD_SQ_2MM 72.3,32.8 r90 top (schematic designator TP14)
TP30 "Pad" PAD_SQ_2MM 89.2,12.3 r90 top (schematic designator TP11)
TP31 "Pad" PAD_SQ_2MM 89.2,16.8 r90 top (schematic designator TP12)
TP32 "Pad" PAD_SQ_2MM 89.2,21.3 r90 top (schematic designator TP13)
TP33 "Pad" PAD_SQ_2MM 87.2,32.8 r90 top (schematic designator TP14)
TP34 "Pad" PAD_SQ_2MM 104.1,12.3 r90 top (schematic designator TP11)
TP35 "Pad" PAD_SQ_2MM 104.1,16.8 r90 top (schematic designator TP12)
TP36 "Pad" PAD_SQ_2MM 104.1,21.3 r90 top (schematic designator TP13)
TP37 "Pad" PAD_SQ_2MM 102.1,32.8 r90 top (schematic designator TP14)
TP38 "Pad" PAD_SQ_2MM 119,12.3 r90 top (schematic designator TP11)
TP39 "Pad" PAD_SQ_2MM 119,16.8 r90 top (schematic designator TP12)
TP40 "Pad" PAD_SQ_2MM 119,21.3 r90 top (schematic designator TP13)
TP41 "Pad" PAD_SQ_2MM 117,32.8 r90 top (schematic designator TP14)
U1 "STM32F042K6T6" STM-LQFP32_M 67,42 r90 top
U2 "23LCV1024-I/SN" MCHP-SOIC-SN8_L 84.8,39.2 r180 top (schematic designator U4)
U3 "LD1117AS33TR" SOT-223_M 84.543,51.867 r0 top (schematic designator U2)
U4 "AD8602ARZ-REEL7" ADI-R-8_M 10.178,19.3 r90 top (schematic designator U3)
U5 "AD8602ARZ-REEL7" ADI-R-8_M 25.078,19.3 r90 top (schematic designator U3)
U6 "AD8602ARZ-REEL7" ADI-R-8_M 39.978,19.3 r90 top (schematic designator U3)
U7 "AD8602ARZ-REEL7" ADI-R-8_M 54.878,19.3 r90 top (schematic designator U3)
U8 "AD8602ARZ-REEL7" ADI-R-8_M 69.778,19.3 r90 top (schematic designator U3)
U9 "AD8602ARZ-REEL7" ADI-R-8_M 84.677,19.3 r90 top (schematic designator U3)
U10 "AD8602ARZ-REEL7" ADI-R-8_M 99.577,19.3 r90 top (schematic designator U3)
U11 "AD8602ARZ-REEL7" ADI-R-8_M 114.477,19.3 r90 top (schematic designator U3)
USR/Boot "TSS 61 K" "Generic SMD Tactile switch" 44,48 r90 top (schematic designator SW2)
Vin "Pad" PAD_SQ_2MM 78,56 r0 top (schematic designator TP1)

## Footprints (in the part's own frame and the unit in brackets; to place one, negate y for a bottom-side part, rotate by r counter-clockwise, add the part's x,y. Pads: shape width x height; smd on the part's side, far side on the other; paste and mask are expansions set on the pad)
ADI-R-8_M [mm] "SOIC, 8-Leads, Body 4.9x3.9mm, Pitch 1.27mm, IPC Low Density"
  oval 2.5x0.7 smd: 1(-2.45,1.905) 2(-2.45,0.635) 3(-2.45,-0.635) 4(-2.45,-1.905) 5(2.45,-1.905) 6(2.45,-0.635) 7(2.45,0.635) 8(2.45,1.905)
  silkscreen extent -2.57,-2.5 0.8,2.93, body extent -2,-2.5 2,2.5, height 1.75
CAP_0603 [mm]
  rrect25% 0.8x1 smd: 1(-0.75,0) 2(0.75,0)
  body extent -0.8,-0.4 0.8,0.4, height 0.51
FB_0805 [mm]
  rrect25% 1x1.7 smd: 1(-0.95,0) 2(0.95,0)
  body extent -1,-0.63 1,0.63, height 0.86
FP-598-8270-107F-MFG [mm]
  rect 1.4x1.5 smd paste+0 mask+0: 1(-1.5,0) 2(1.5,0)
  silkscreen extent -2.9,-0.9 0.43,0.9, body extent -2.3,-1 2.3,1, height 0.25
FP-B5B-PH-K-S_LF_SN-MFG [mm]
  rect 1.2x1.2 hole 0.7 paste-2539.97 mask+0: 1(-4,0.55)
  round 1.2 hole 0.7 paste-2539.97 mask+0: 2(-2,0.55) 3(0,0.55) 4(2,0.55) 5(4,0.55)
  silkscreen extent -6.67,-2.25 5.95,2.25, body extent -6.05,-2.35 6.05,2.35, height 0.25
FP-SOT457-IPC_A [mm]
  rect 1.3x0.516 smd paste+0 mask+0: 1(-1.125,0.95)
  rrect100% 1.3x0.516 smd paste+0 mask+0: 2(-1.125,0) 3(-1.125,-0.95) 4(1.125,-0.95) 5(1.125,0) 6(1.125,0.95)
  silkscreen extent -2.8,-1.7 1.38,1.7, body extent -2.55,-1.95 2.55,1.95, height 0.25
"Generic SMD Tactile switch" [mm]
  rrect50% 1.55x1.3 smd: 1(-3.975,2.25) 2(3.975,2.25) 3(-3.975,-2.25) 4(3.975,-2.25)
  silkscreen extent -5.5,-3.5 5.5,3.5, body extent -4.43,-3.15 4.57,3.05, height 4.48
JST-B2B-EH-A_V [mm] "THD, 2-Leads, Body 7.5x3.8mm, Pitch 2.5mm"
  rect 1.4x1.4 hole 0.9: 1(-1.25,0.3)
  round 1.4 hole 0.9: 2(1.25,0.3)
  silkscreen extent -3.75,-1.9 3.75,2.67, body extent -3.75,-1.9 3.75,1.9, height 6
LUMX-SML-LX1206IC_V [mm] "SMD, 2-Leads, Body 3.2x1.5mm"
  rect 1.2x1.5 smd: 1(-1.35,0) 2(1.35,0)
  silkscreen extent -0.35,-0.75 2.45,0.75, body extent -1.6,-0.8 1.6,0.8, height 1.1
M3_Hole [mm]
MCHP-SOIC-SN8_L [mm] "SOIC, 8-Leads, Body 4.9x3.9mm, Pitch 1.27mm, IPC High Density"
  oval 1.75x0.6 smd: 1(-2.375,1.905) 2(-2.375,0.635) 3(-2.375,-0.635) 4(-2.375,-1.905) 5(2.375,-1.905) 6(2.375,-0.635) 7(2.375,0.635) 8(2.375,1.905)
  silkscreen extent -2.5,-2.45 1.1,2.88, body extent -1.95,-2.45 1.95,2.45, height 1.75
PAD_SQ_2MM [mm]
  rect 2x2 smd paste-1: 1(0,0)
RES_0603 [mm]
  rrect25% 0.8x1 smd: 1(-0.75,0) 2(0.75,0)
  body extent -0.8,-0.43 0.8,0.43, height 0.52
SOT-223_M [mm] "SOT223, 4-Leads, Body 6.5x3.5mm, Pitch 2.3mm, Lead Span 7mm, IPC Low Density"
  rect 2.7x1 smd: 1(-2.95,2.3) 2(-2.95,0) 3(-2.95,-2.3)
  rect 2.7x3.3 smd: 4(2.95,0)
  silkscreen extent -3.07,-3.35 1.3,3.47, body extent -1.85,-3.35 1.85,3.35, height 1.8
STM-LQFP32_M [mm] "QFP, 32-Leads, Body 7x7mm, Pitch 0.8mm, IPC Low Density"
  oval 1.95x0.6 smd: 1(-4.225,2.8) 2(-4.225,2) 3(-4.225,1.2) 4(-4.225,0.4) 5(-4.225,-0.4) 6(-4.225,-1.2) 7(-4.225,-2) 8(-4.225,-2.8) 17(4.225,-2.8) 18(4.225,-2) 19(4.225,-1.2) 20(4.225,-0.4) 21(4.225,0.4) 22(4.225,1.2) 23(4.225,2) 24(4.225,2.8)
  oval 0.6x1.95 smd: 9(-2.8,-4.225) 10(-2,-4.225) 11(-1.2,-4.225) 12(-0.4,-4.225) 13(0.4,-4.225) 14(1.2,-4.225) 15(2,-4.225) 16(2.8,-4.225) 25(2.8,4.225) 26(2,4.225) 27(1.2,4.225) 28(0.4,4.225) 29(-0.4,4.225) 30(-1.2,4.225) 31(-2,4.225) 32(-2.8,4.225)
  silkscreen extent -4.35,-2.85 2.85,3.77, body extent -3.5,-3.5 3.5,3.5, height 1.6
USB-MICRO-B_V [mm] "USB, MICRO B, Body 7.491x4.695 mm, Pitch 0.65 mm"
  rect 0.4x1.35 smd: 1(-1.3,1.35) 2(-0.65,1.35) 3(0,1.35) 4(0.65,1.35) 5(1.3,1.35)
  round 1.45 hole 0.85: 6(-2.5,1.35) 7(2.5,1.35)
  rrect50% 0x0 hole 0.6 slot 1.3 at 90 deg: 8(-3.5,-1.35) 11(3.5,-1.35)
  rect 1.5x1.9 smd: 9(-1,-1.35) 10(1,-1.35)
  Top Layer circle w0.5: c-3.6,-1.8 r0.25
  Top Layer circle w0.5: c-3.6,-0.9 r0.25
  Top Layer circle w0.5: c3.6,-1.8 r0.25
  Top Layer circle w0.5: c3.6,-0.9 r0.25
  Top Layer region: -3.6,-1.8 -3.6,-0.9 -4.1,-0.9 -4.1,-1.8
  Top Layer region: 3.6,-0.9 3.6,-1.8 4.1,-1.8 4.1,-0.9
  Top Layer region: 2.3,-0.4 2.3,-2.3 3.6,-2.3 3.6,-0.4
  Top Layer region: -2.3,-2.3 -2.3,-0.4 -3.6,-0.4 -3.6,-2.3
  silkscreen extent -3.75,-3.5 3.75,2.7, body extent -4.1,-3.9 4.1,1.5, height 2.67

## Part data
3_3V Power: library part CMP-15384-000006-1, "SM LED 1206 ALINGAP G 7 REEL", Case Code (Imperial)=1206, Case Code (Metric)=3216, Color=Green, Forward Current=20mA, Forward Voltage=2V, Lens Color=Colorless, Max Operating Temperature=85°C, Min Operating Temperature=-30°C, Package Quantity=3000, Power Dissipation=60mW, Reverse Voltage=5V, Case/Package=1206, Depth=1.6mm, Dominant Wavelength=570nm, Height=0.7mm, Illumination Color=Green, Lead Free="Lead Free", Length=3.2mm, Lens Size=1.6mm, Lens Style=Flat, Lens Transparency=Clear, Luminous Intensity=20mcd, Mount="Surface Mount", Number of Elements=1, Number of LEDs=1, Number of Pins=2, Packaging="Tape and Reel", Radiation Hardening=No, REACH SVHC="No SVHC", RoHS Compliant=Yes, Series=598, Test Current=20mA, Viewing Angle=140°, Wavelength=570nm, Width=1.6mm
3V3 Boot CS MISO MOSI NRST SCK SWDIO TP10 TP11 TP13 TP13 TP14 TP15 TP16 TP17 TP18 TP19 TP20 TP21 TP22 TP23 TP24 TP25 TP26 TP27 TP28 TP29 TP30 TP31 TP32 TP33 TP34 TP35 TP36 TP37 TP38 TP39 TP40 TP41 Vin: library part PAD_SQ_2MM, "Test Point Square 2mm"
C1 C2 C3 C4 C5 C6 C7 C8 C9 C10 C11 C12 C13 C14 C15 C16 C17 C18 C19 C20 C21 C22 C23 C24 C25 C26 C27 C28 C29 C30 C31 C32 C33 C34 C35 C36 C37 C38 C39 C40 C41 C42 C43 C44 C45 C46 C47 C48 C49 C50 C51 C52 C53 C54 C55 C56 C57 C58 C59 C60 C61 C62 C63 C64 C65 C66 C67 C68 C69 C70 C71 C72 C73 C74 C75: library part CAP_0603, "Capacitor SMD 0603, X7R, 10V"
CH0 CH1 CH2 CH3 CH4 CH5 CH6 CH7: library part CMP-2000-05887-1, "Male Header, Pitch 2.5 mm, 1 x 2 Position, Height 6 mm, Tail Length 3.2 mm, -25 to 85 degC, RoHS, Bulk", Color=Natural, Manufacturer=JST, Package Description="Male Header, Pitch 2.5 mm, 1 x 2 Position, Height 6 mm, Tail Length 3.2 mm", Standard Package=1,000, Category=Connectors,Interconnects, Connector Type=Header,Shrouded, Contact Finish=Tin-Lead, Contact Finish Thickness=-, Contact Mating Length="0.130\"(3.30mm)", Contact Type=MalePin, Datasheet URL=http://media.digikey.com/pdf/Data%20Sheets/JST%20PDFs/EH%20Series.pdf, Datasheet Version=10/2002, Family=RectangularConnectors-Headers,MalePins, Fastening Type=DetentLock, Features=-, Manufacturer URL=http://www.jst.com/home2.html, Mating Products=455-1000-ND-CONNHOUSINGEH2POS2.5MMCRIMP455-2933-ND-CONNRECEPTHR2POS2.5MMBLACK455-2934-ND-CONNRECEPTHR2POS2.5MMWHITE455-1044-ND-CONNRECEPTHR2POS2.5MMWHITE455-1057-ND-CONNRECEPTHR2POS2.5MMBLACK, Mounting Technology=ThroughHole, Mounting Type=ThroughHole, Number of Positions=2, Number of Positions Loaded=All, Number of Rows=1, Other Names=455-1014, Package Reference=B2B-EH-A, Packaging=Bulk, Pitch="0.098\"(2.50mm)", Row Spacing=-, Series=EH, Termination=Press-Fit
D1: library part CMP-14432-000004-1, "TVS DIODE 5.5VWM 6TSOP", RoHS Compliant=Yes
D4 D5 D6 D7 D8 D9 D10 D11 D12 D13 D14 D15 D16 D17 D18 D19 D20 D21 D22 D23 D24 D25 D26 D27 D28 D29 D30 D31 D32 D33: library part CMP-2000-07123-1, "LED Red, 65 mW, -40 to 85 degC, 2-Pin SMD, RoHS, Tape and Reel", Color=Red, Manufacturer=Lumex, Operating Temperature=-25to85C, Package Description="2-Pin Surface Mount Device, Body 3.2 x 1.5 mm", Package Reference=SML-LX1206IC, Reverse Voltage=5(Min)V, Supplier_Package=SMD, Datasheet URL=http://www.lumex.com/content/files/ProductAttachment/SML-LX1206IC-TR.pdf, Datasheet Version="Rev. J, 08/2012", Dimension=3.2x1.6x1.1mm, Dominant Wavelength=N/A, ECCN=EAR99, Family=SML-LX1206IC, HTS=8541402000, Intensity=6mcd, LED Material=GaAsP, Lens Appearance=ColorlessNonDiffused, Lens Dimensions=2x1.6x0.5mm, Manufacturer URL=http://www.lumexinstruments.com/, Mounting=SurfaceMount, Mounting Technology=SurfaceMount, Number of LEDs=1, Packaging=TapeandReel, Part No=SML-LX1206IC-TR, Peak Wavelength=635nm, Pin_Count=2, RoHS=Unknown, Supplier=Lumex, Supplier Standard Pack=3,000, Type=Uni-Color, Viewing Angle=160
FB1: library part FB_0805, "Ferrite Bead SMD 0805"
J1: library part CMP-2000-05827-1, "Micro-USB B Receptacle, Right Angle, Bottom Mount, Surface Mount, with Solder Tabs, -30 to 85 degC, 5-Pin USB, RoHS, Tape and Reel", Manufacturer=Molex, Package Description="5-Leads USB, Micro B, Body 7.5 x 5 mm, Pitch 0.65 mm", Package Reference=MICRO-B, Package Version="Rev. F, 12/2012", Standard Package=1, Voltage - Max=30V, 3D Model=105017-0001.stp, Catalog Drawings=1050170001, Category=Connectors,Interconnects, Circuits=5, Connector Type=USB-microB, Datasheet URL=http://www.molex.com/elqNow/elqRedir.htm?ref=http://www.molex.com/webdocs/datasheets/pdf/en-us/1050170001_IO_CONNECTORS.pdf, Datasheet Version=03/2016, Family=USB,DVI,HDMIConnectors, Featured Product=Micro-USBConnectorsUSBConnectors, Features=Shielded,SolderRetention, Gender=Receptacle, Ingress Protection=-, Manufacturer URL=http://www.molex.com/, Mating Products=WM17145-ND-CABLEMICROUSBBTOSTDA1.0MWM17147-ND-CABLEMICROUSBBTOSTDA2.0MWM17146-ND-CABLEMICROUSBBTOSTDA1.5M, Mounting Technology=SurfaceMount, Mounting Type=BoardCutout,SurfaceMount,RightAngle, Number of Contacts=5, Online Catalog=Molex-MicroUSB, Other Names=WM1399DKR, Package URL=http://www.molex.com/pdm_docs/sd/1050170001_sd.pdf, Packaging=Digi-Reel®, PCN Assembly/Origin=ResinSupplier21/Oct/2015, RoHS Information=1050170001CertofCompliance, Series=-, Specifications=-
J2: library part CMP-2000-05908-2, "CONN HEADER VERT 5POS 2MM", Color=Natural, Contact Resistance=20mR, Current Rating=2A, Flammability Rating="UL94 V-0", Housing Color=White, Insulation Resistance=1MR, Max Operating Temperature=85°C, Max Voltage Rating (AC)=100V, Min Operating Temperature=-25°C, Connector Type=Header, Contact Finish - Mating=TIN, Contact Material=Brass, Contact Mating Length=0.13inch, Contact Plating=Tin, Contact Shape=Square, Contact Type="Male Pin", Depth=4.5mm, Fastening Type=Detent, Gender=Male, Height=9.4mm, Housing Material=Polyamide, Insulation Color=Natural, Insulation Material=Nylon, Lead Free="Lead Free", Lead Pitch=2mm, Length=11.9mm, Mated Stacking Heights=8mm, Material=Polyamide, Max Current Rating=2A, Mount="Through Hole", Number of Contacts=5, Number of Pins=5, Number of Poles=5, Number of Positions=5, Number of Rows=1, Orientation=Straight, Packaging=Bulk, Pitch=2mm, REACH SVHC="No SVHC", Series=PH, Termination=Solder, Voltage Rating=100V, Voltage Rating (AC)=100V, Width=4.5mm, Working Voltage=100V
R1 R2 R3 R4 R5 R6 R7 R8 R9 R10 R11 R12 R13 R14 R15 R16 R17 R18 R19 R20 R21 R22 R23 R24 R25 R26 R27 R28 R29 R30 R31 R32 R33 R34 R35 R36 R37 R38 R39 R40 R41 R42 R43 R44 R45 R46 R47 R48 R49 R50 R51 R52 R53 R54 R55 R56 R57 R58 R59 R60 R61 R62 R63 R64 R65: library part RES_0603, "Resistor SMD 0603"
RST USR/Boot: "Keypad Switch, 1 Switches, SPST, Momentary, 0.05A, 12VDC, 1.47N, Solder Terminal, Surface Mount-straight", Contact Current(DC)-Max=50mA, Contact DC Max Rating R Load=.05A@12VDC, Contact Resistance=0.1mR, Contact Voltage(DC)-Max=12V, Dielectric Withstand Volts=250VACV, Insulation Resistance=100MR, Manufacturer=Knitter-Switch, Manufacturer Part Number=TSS61K, Max Operating Temperature=85°C, Min Operating Temperature=-40°C, Operating Force-Max=1.47N, Actuator Length=0.031inch, Actuator Type=STEM, Body Breadth=6.2inch, Body Height=3.5mm, Body Length or Diameter=6.2mm, Category="Tactile Switches", Center Contact Plating=Silver, Circuit Configuration=1X1, ComponentLink1Description=https://datasheet.ciiva.com:443/pdfs/VipMasterIC/IC/KNSW/KNSW-S-A0003711307/KNSW-S-A0003711307-1.pdf?src-supplier=IHS+Markit, ComponentLink1URL=https://datasheet.ciiva.com:443/pdfs/VipMasterIC/IC/KNSW/KNSW-S-A0003711307/KNSW-S-A0003711307-1.pdf?src-supplier=IHS+Markit, ComponentLink2Description=http://www.knitter-switch.com/pdf_en/3_6_3%20TSS%20TS%20TMSE.pdf?src-supplier=Avnet, ComponentLink2URL=http://www.knitter-switch.com/pdf_en/3_6_3%20TSS%20TS%20TMSE.pdf?src-supplier=Avnet, Contact Material=Bronze, Electrical Life=200000Cycles, End Contact Material=Bronze, End Contact Plating=Silver, Housing Material="Stainless Steel", JESD-609 Code=e4, Mounting Technology="Surface Mount", Number of Switches=1, Reach SVHC Compliant=Yes, RoHS=Yes, RoHS Compliant=Yes, Solderability=REFLOW, Stock=975, Supplier=TME, Supplier Part Number=TSS61K, Switch Action=MOMENTARY, Switch Function=SPST, Switch Type=Keypad, Terminal Finish=Silver, Terminal Material=Brass, Termination=Solder
U1: library part CMP-0304-00114-2, "ARM Cortex-M0 32-bit MCU, 32 KB Flash, 6 KB Internal RAM, 28 I/Os, 32-Pin LQFP, -40 to 85 degC, Tray", I/Os (High Current)=28, Manufacturer=STMicroelectronics, Operating Frequency(F) (Processor speed) (MHz)=48, Package Description="32-Pin Low Profile Quad Flat Package, 7 x 7 mm Body, 0.8 mm Pitch", Package Reference=LQFP32, Supply Voltage(Vcc) min (V)=2, ComponentLink1Description="Manufacturer URL", ComponentLink1URL=http://www.st.com/, ComponentLink2Description=Datasheet, ComponentLink2URL=http://www.st.com/st-web-ui/static/active/en/resource/technical/document/datasheet/DM00105814.pdf, Core="ARM Cortex-M0", DatasheetVersion="Rev. 5", FLASH Size (Prog) (kB)=32, Internal RAM Size (kB)=6, Mounting Technology="Surface Mount", Packing=Tray, PartNumber=STM32F042K6T6
U2: library part CMP-0163-00037-1, "1024K bits SPI Serial SRAM with Battery Backup and SDI Interface, 2.5 to 5.5 V, 20 MHz, -40 to 85 degC, 8-pin SOIC (SN8), Tube", Manufacturer=Microchip, ComponentLink1Description="Manufacturer URL", ComponentLink1URL=http://www.microchip.com, ComponentLink2Description=Datasheet, ComponentLink2URL=http://ww1.microchip.com/downloads/en/DeviceDoc/25156A.pdf, ComponentLink3Description="Package Specification", ComponentLink3URL=http://www.microchip.com/stellent/groups/techpub_sg/documents/packagingspec/en012702.pdf, ComponentLink4Description="Product URL", ComponentLink4URL=http://www.microchip.com/23LCV1024, DatasheetVersion="Rev. A", Mounting Technology="Surface Mount", PackageDescription="8-Lead Plastic Small Outline, 4.9 x 3.9 mm Body, 1.27 mm Pitch", PackageReference=SOIC-SN8, PackageVersion=C04-057C, PartNumber=23LCV1024-I/SN
U3: library part CMP-0244-00316-1, "1A, Low Drop Positive Voltage Regulator, 3.3V, 4-Pin SOT-223, Tape and Reel", ComponentLink1Description="Manufacturer URL", ComponentLink1URL=http://www.st.com, ComponentLink2Description=Datasheet, ComponentLink2URL=http://www.st.com/internet/com/TECHNICAL_RESOURCES/TECHNICAL_LITERATURE/DATASHEET/CD00002116.pdf, DatasheetVersion=2/12/2011, PackageDescription="4-Pin SOT-223 Package, 6.5 x 3.5 mm Body, 2.3 mm Pitch, 7 mm Lead Span", PackageReference=SOT-223, PackageVersion=2010
U4 U5 U6 U7 U8 U9 U10 U11: library part CMP-0384-00561-1, "Double Channel Wide Bandwidth Operational Amplifier, 8.4 MHz BW, 6 V/us SR, Industrial, 8-pin SOIC (R-8), Reel", Amplifiers Per Package=2, Generic Part Number=AD8602, Input Bias Current=200fA, Input Offset Voltage=500uV, Manufacturer="Analog Devices", Automotive Qualified=Yes, Code_JEDEC=MS-012-AA, ComponentLink1Description="Manufacturer URL", ComponentLink1URL=http://www.analog.com/en/index.html, ComponentLink2Description=Datasheet, ComponentLink2URL=http://www.analog.com/static/imported-files/data_sheets/AD8601_8602_8604.pdf, ComponentLink3Description="Package Specification", ComponentLink3URL=http://www.analog.com/static/imported-files/packages/PKG_PDF/SOIC_Narrow%20(R)/R_8.pdf, DatasheetVersion="Rev. G", Iq/Amp=1.2mA, Mounting Technology="Surface Mount", PackageDescription="8-Pin Standard Small Outline Package, Body 3.9 x 4.9 mm, Pitch 1.27 mm", PackageReference=R-8, PackageVersion=060506-A, PartNumber=AD8602ARZ-REEL7, Slew Rate=6V/us, Small Signal Bandwidth=8.4MHz, V Span Max=6V, V Span Min=2.7V

## Via types
v1: diameter 0.9, hole 0.4, Top Layer to Bottom Layer, tented both sides, 110 vias
v2: diameter 0.6/0.6/0.6/0.6 (per signal layer), hole 0.4, Top Layer to Bottom Layer, 24 vias
v3: diameter 6, hole 3.2, Top Layer to Bottom Layer, 4 vias
v4: diameter 0.9, hole 0.4, Top Layer to Bottom Layer, 1 vias

## Nets (pads, with @x,y where several pads share a name; then routed paths per layer and width w, separated by ;. In a path a pad name is that pad's centre, name@x,y a point inside that pad or via, vN(x,y) a via of type N, cw(c..) or ccw(c..) an arc to the next point about the centre after c; other vN are vias at no path point)
3V3: 3V3.1 C5.2 C6.2 C7.2 C8.2 C9.2 C10.2 C11.2 C13.2 C16.2 C20.2 C23.2 C27.2 C30.2 C34.2 C37.2 C41.2 C44.2 C48.2 C51.2 C55.2 C58.2 C62.2 C65.2 C69.2 J2.4 R2.2 R8.2 R9.2 R15.2 R16.2 R22.2 R23.2 R29.2 R30.2 R36.2 R37.2 R43.2 R44.2 R50.2 R51.2 R57.2 R58.2 U1.1 U1.5 U1.17 U2.7 U2.8 U3.2 U3.4 U4.8 U5.8 U6.8 U7.8 U8.8 U9.8 U10.8 U11.8 USR/Boot.3 USR/Boot.4 | length 121.1
  Top Layer w0.3: v1(5.496,13.392) 5.5,13.396 6.846,13.396 R9.2@6.85,13.4 ; v1(6.696,24.692) 6.7,24.696 8.046,24.696 C20.2@8.05,24.7 ; R8.2@6.878,9.375 R9.2@6.878,13.375 ; C20.2@8.112,24.617 8.196,24.532 8.196,21.827 U4.8@8.273,21.75 ; v1@20.4,13.296 R16.2@21.746,13.296 ; v1@21.6,24.596 C27.2@22.946,24.596 ; R15.2@21.778,9.375 R16.2@21.778,13.375 ; C27.2@23.012,24.617 23.096,24.532 23.096,21.827 U5.8@23.173,21.75 ; v1@35.3,13.296 R23.2@36.646,13.296 ; v1@36.5,24.596 C34.2@37.846,24.596 ; R22.2@36.678,9.375 R23.2@36.678,13.375 ; C34.2@37.912,24.617 37.996,24.532 37.996,21.827 U6.8@38.073,21.75 ; v1(44.834,43.701) 44.846,43.713 45.938,43.713 USR/Boot.3@46.25,44.025 ; USR/Boot.4@46.25,51.975 46.562,52.288 48.388,52.288 v1(48.4,52.3) ; v1@50.2,13.296 R30.2@51.546,13.296 ; v1@51.4,24.596 C41.2@52.746,24.596 ; R29.2@51.578,9.375 R30.2@51.578,13.375 ; C41.2@52.812,24.617 52.896,24.532 52.896,21.827 U7.8@52.973,21.75 ; R2.2@56.7,52.35 56.704,52.346 56.704,51 v1(56.708,50.996) ; v1(59.63,35.1) 59.792,35.1 60.042,35.35 C8.2@61.2,35.35 C6.2@63.1,35.35 63.2,35.35 64.2,36.35 U1.1@64.2,37.775 ; v1(64.482,35.1) 64.644,35.1 64.894,35.35 C9.2@65.8,35.35 C10.2@67.5,35.35 ; v1@65.1,13.296 R37.2@66.446,13.296 ; v1@66.3,24.596 C48.2@67.646,24.596 ; R36.2@66.478,9.375 R37.2@66.478,13.375 ; U1.5@67.4,37.775 67.409,37.766 67.409,36.35 67.5,36.259 C10.2@67.5,35.35 ; C10.2@67.7,35.35 C10.2@67.5,35.35 ; C48.2@67.712,24.617 67.796,24.532 67.796,21.827 U8.8@67.873,21.75 ; U1.17@69.8,46.225 69.857,46.282 69.857,47.17 69.881,47.193 69.881,48.581 C5.2@70.1,48.8 C7.2@70.1,50.8 ; C7.2@70.312,51.012 C7.2@70.1,50.8 ; v1(70.827,52.427) 70.1,51.7 C7.2@70.1,50.8 ; v1(78.6,37.5) 78.691,37.409 80.12,37.409 C11.2@80.211,37.318 ; v1@80,13.296 R44.2@81.346,13.296 ; C11.2@80.215,37.314 U2.8@82.406,37.314 ; v1@81.2,24.596 C55.2@82.546,24.596 ; R43.2@81.378,9.375 R44.2@81.378,13.375 ; U2.8@82.425,37.295 U2.7@82.425,38.565 ; C55.2@82.612,24.617 82.696,24.532 82.696,21.827 U9.8@82.772,21.75 ; v1@94.902,13.314 R51.2@96.248,13.314 ; v1@96.102,24.614 C62.2@97.448,24.614 ; R50.2@96.278,9.375 R51.2@96.278,13.375 ; C62.2@97.512,24.617 97.596,24.532 97.596,21.827 U10.8@97.672,21.75 ; v1@109.8,13.296 R58.2@111.146,13.296 ; v1@111,24.596 C69.2@112.346,24.596 ; R57.2@111.178,9.375 R58.2@111.178,13.375 ; C69.2@112.412,24.617 112.496,24.532 112.496,21.827 U11.8@112.572,21.75
  Top Layer w0.6: U3.2@81.593,51.867 U3.4@87.493,51.867 ; 3V3.1@87.509,57.481 87.493,57.466 U3.4@87.493,51.867 ; C13.2@90.458,51.775 C13.2@90.358,51.775 87.585,51.775 U3.4@87.493,51.867
  other v1: 20.396,13.292 35.296,13.292 50.196,13.292 65.096,13.292 79.996,13.292 94.898,13.31 109.796,13.292 21.596,24.592 36.496,24.592 51.396,24.592 66.296,24.592 81.196,24.592 110.996,24.592 96.098,24.61 91.915,50.521 93.337,50.521 91.915,51.622 93.337,51.622 91.915,52.723 93.337,52.723
BOOT_MODE: Boot.1 C1.2 R1.2 U1.31 USR/Boot.1 USR/Boot.2 | length 36.9
  Top Layer w0.3: USR/Boot.1@41.75,44.025 41.75,44.055 42.237,44.542 42.267,44.542 44.475,46.75 45.6,46.75 ; USR/Boot.2@41.75,51.975 41.75,51.85 45.7,47.9 45.7,46.85 45.6,46.75 ; R1.2@49,49.15 C1.2@49,46.75 ; Boot.1@52.412,47.105 51.969,46.662 v1(50.42,46.662) ; U1.31@62.775,40 61.198,40 60.65,39.452 57.63,39.452 v1(50.42,46.662) ; 45.6,46.75 C1.2@49,46.75 ; C1.2@49,46.75 49.044,46.706 50.376,46.706 v1(50.42,46.662)
D_N: D1.6 J1.2 U1.21 | length 14.7
  Top Layer w0.133: U1.21@66.6,46.225 66.6,46.942 66.33,47.211 66.33,49.535 68.43,51.635 68.43,54.822 68.508,54.9 68.653,54.9 D1.6@69.034,55.28 ; J1.2@68.635,58.791 68.635,58.316 68.44,58.122 68.44,55.7 68.598,55.542 68.668,55.542 68.93,55.28 D1.6@69.034,55.28 ; D1.6@69.426,55.28 D1.6@69.034,55.28
D_P: D1.1 J1.3 U1.22 | length 15.1
  Top Layer w0.133: U1.22@65.8,46.225 65.8,46.942 66.07,47.211 66.07,49.643 68.17,51.743 68.17,54.822 68.092,54.9 67.947,54.9 67.567,55.28 D1.1@67.175,55.28 67.366,55.471 67.951,55.471 68.18,55.7 68.18,58.122 67.985,58.316 J1.3@67.985,58.791
GND: 3_3V.1 C1.1 C2.1 C3.1 C4.1 C5.1 C6.1 C7.1 C8.1 C9.1 C10.1 C11.1 C12.1 C13.1 C14.2 C15.2 C16.1 C20.1 C21.2 C22.2 C23.1 C27.1 C28.2 C29.2 C30.1 C34.1 C35.2 C36.2 C37.1 C41.1 C42.2 C43.2 C44.1 C48.1 C49.2 C50.2 C51.1 C55.1 C56.2 C57.2 C58.1 C62.1 C63.2 C64.2 C65.1 C69.1 CH0.1 CH1.1 CH2.1 CH3.1 CH4.1 CH5.1 CH6.1 CH7.1 D1.2 J1.5 J1.6 J1.7 J1.8 J1.9 J1.10 J1.11 J2.5 Power.1 R1.1 R10.1 R17.1 R24.1 R31.1 R38.1 R45.1 R52.1 R59.1 RST.1 RST.2 U1.16 U1.32 U2.4 U3.1 U4.4 U5.4 U6.4 U7.4 U8.4 U9.4 U10.4 U11.4 | length 12.1
  Top Layer w0.3: C16.1@8.378,11.375 8.603,11.6 v1(9.6,11.6) ; C23.1@23.278,11.375 23.503,11.6 v1(24.5,11.6) ; C30.1@38.278,11.375 38.503,11.6 v1(39.5,11.6) ; C37.1@53.178,11.375 53.403,11.6 v1(54.4,11.6) ; C44.1@68.178,11.375 68.403,11.6 v1(69.4,11.6) ; C51.1@83.078,11.375 83.303,11.6 v1(84.3,11.6) ; U2.4@87.175,41.105 87.3,41.23 v1(87.3,42.6) ; C58.1@97.878,11.375 98.103,11.6 v1(99.1,11.6) ; C65.1@112.778,11.375 113.003,11.6 v1(114,11.6)
LD_0: C75.2 D29.2 D30.2 D31.2 D32.2 D33.2 R65.1 U1.25 | length 52.7
  Top Layer w0.3: R65.1@33,39.75 C75.2@35,39.75 35,40.597 v1@35.381,40.978 ; R65.1@33.004,39.754 33.004,41.062 33.65,41.709 D29.2@33.65,43.257 D30.2@33.65,47.257 D31.2@33.65,51.257 D32.2@33.65,55.257 ; D32.2@33.65,55.257 D33.2@33.65,59.257 ; v1(60.617,45.444) 61.262,44.8 U1.25@62.775,44.8
  Bottom Layer w0.3: v1(35.381,41.05) 44.372,41.05 48.797,45.475 60.587,45.475 v1(60.617,45.444)